# Altium PCB PCB_main_SAFMR.PcbDoc (part 1 of 3)
Units mm, origin at the board's own origin, x right, y up, seen from the top; angles counter-clockwise.
Board outline 128.65 x 96.9 mm, 4 copper layers (Top Layer 1, Top Layer, Bottom Layer, Bottom Layer 1), stack 0.603 mm thick; 100 components, 147 nets, 534 pads, 161 vias.
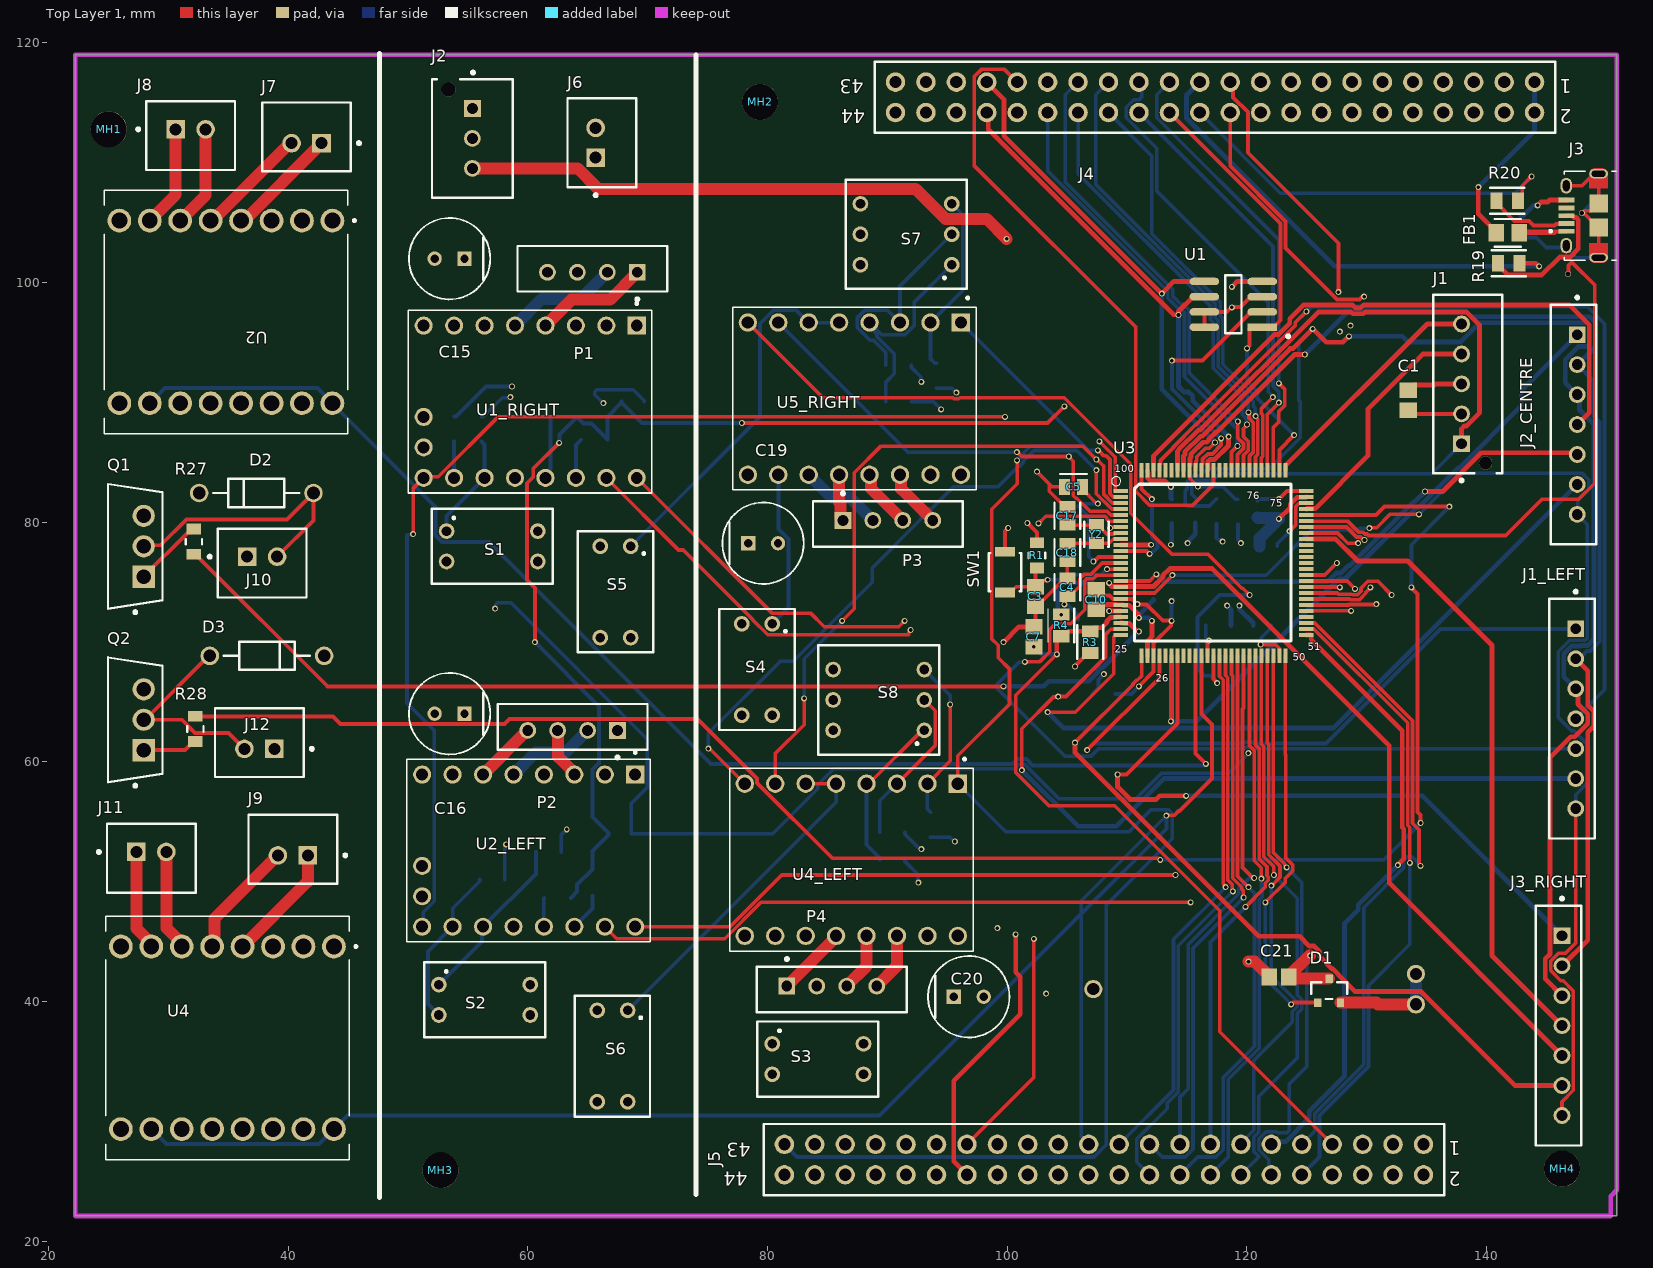
[diagram p0: Top Layer 1 view]
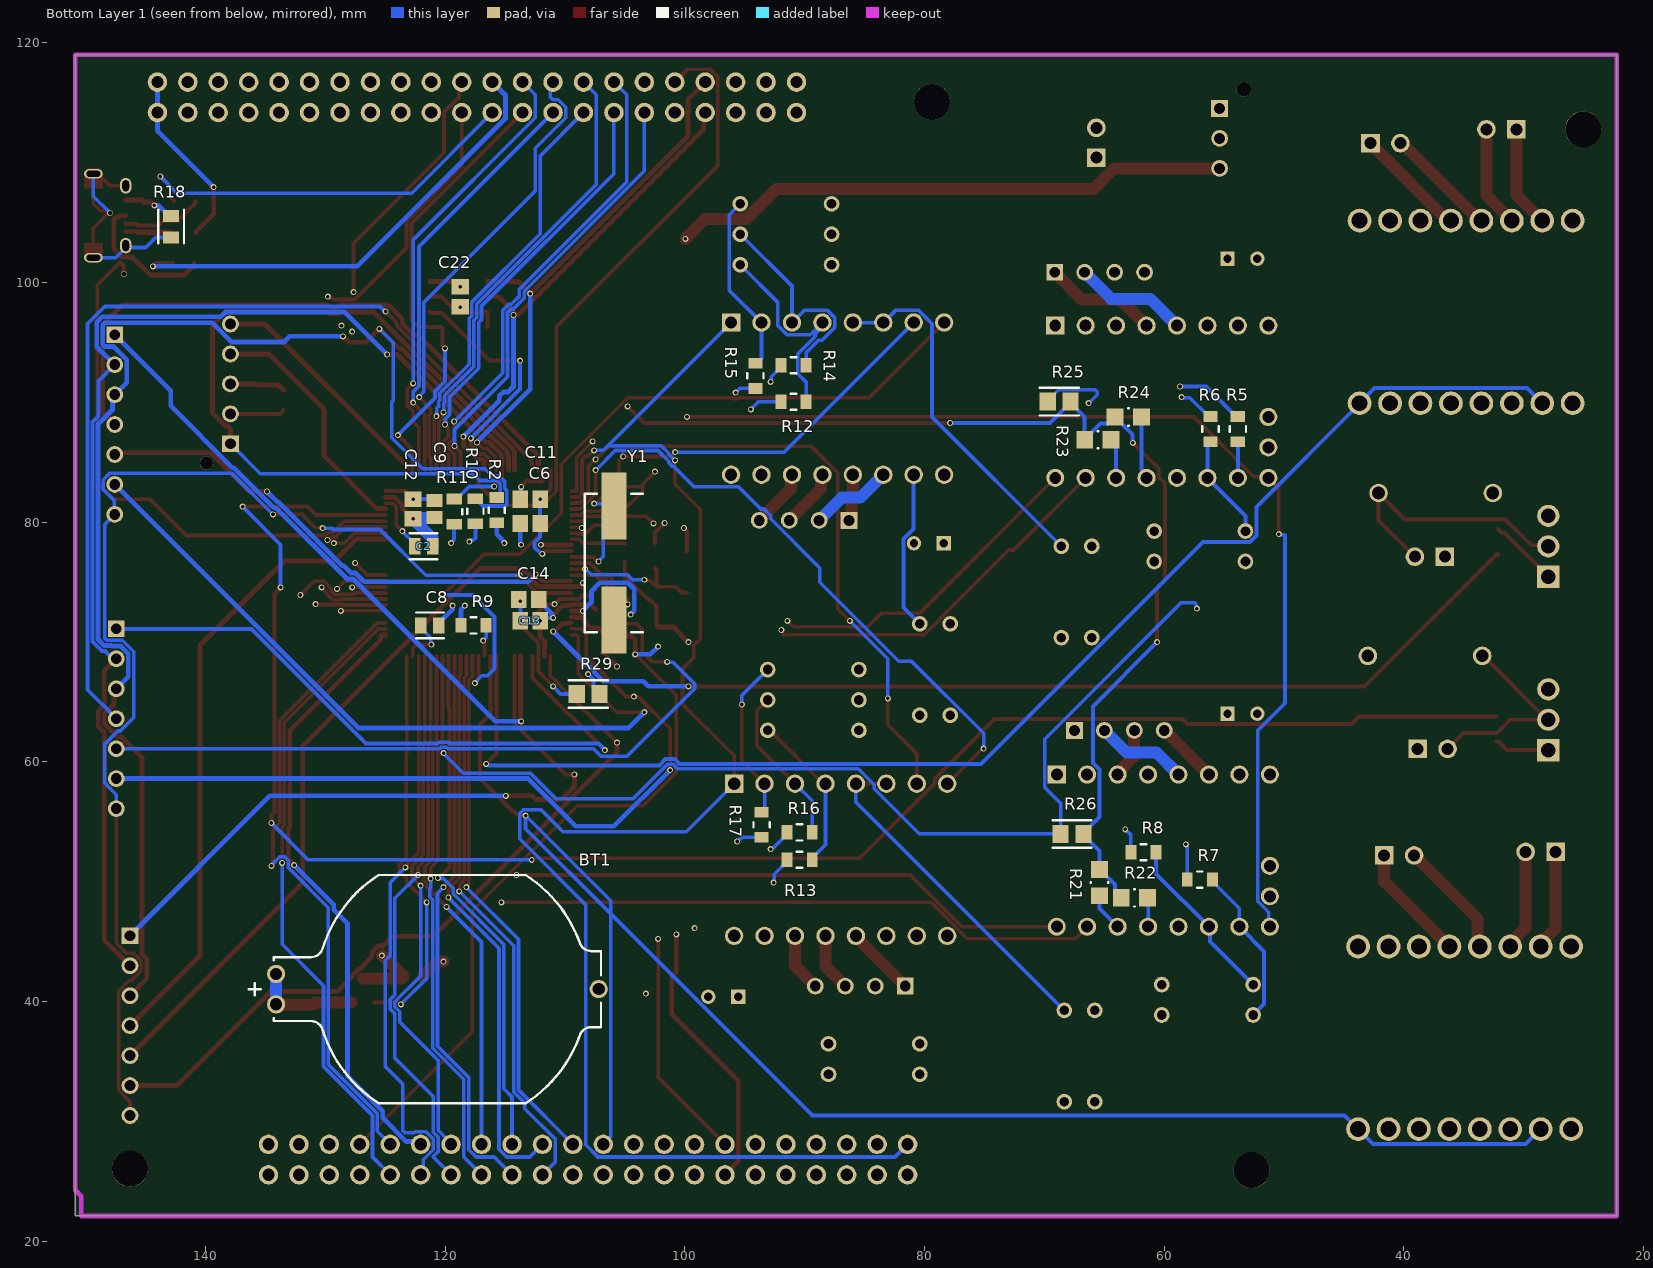
[diagram p1: Bottom Layer 1 view, seen from below]
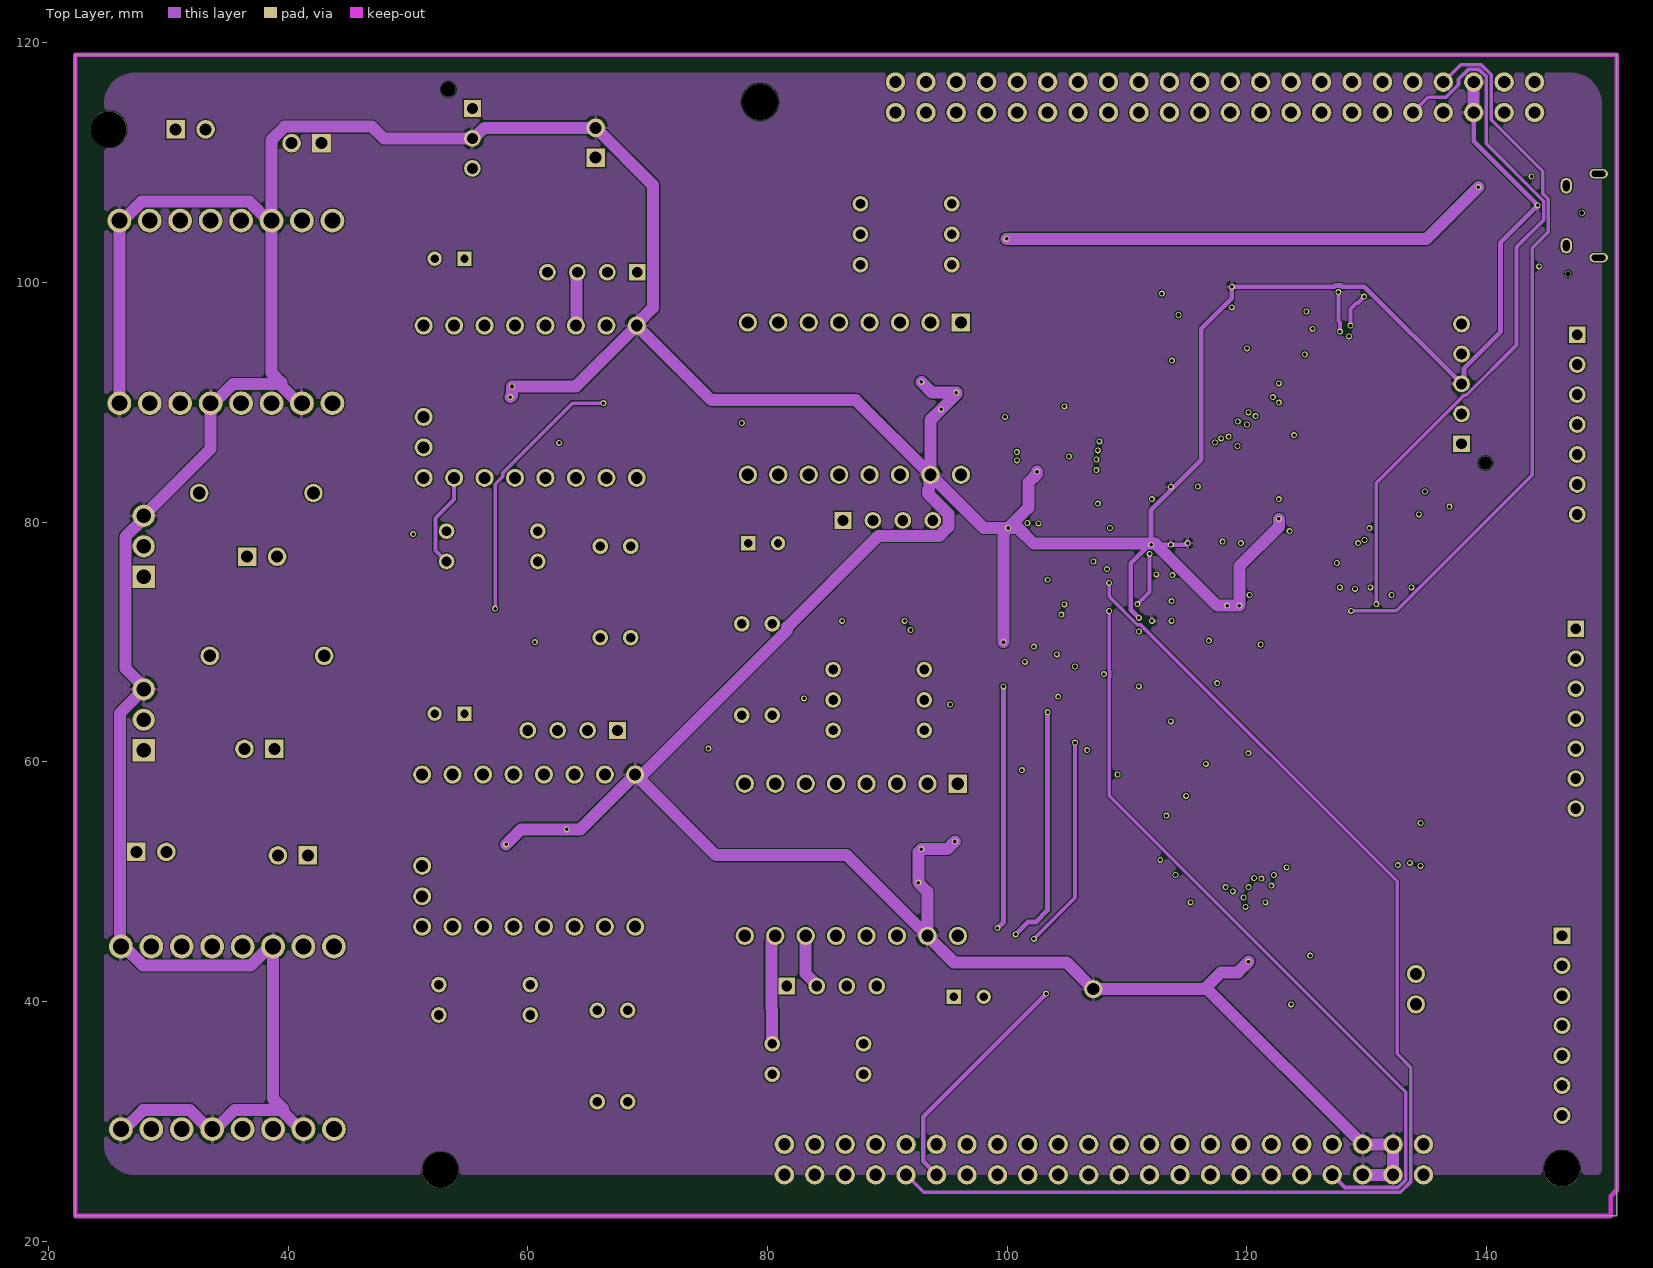
[diagram p2: Top Layer]
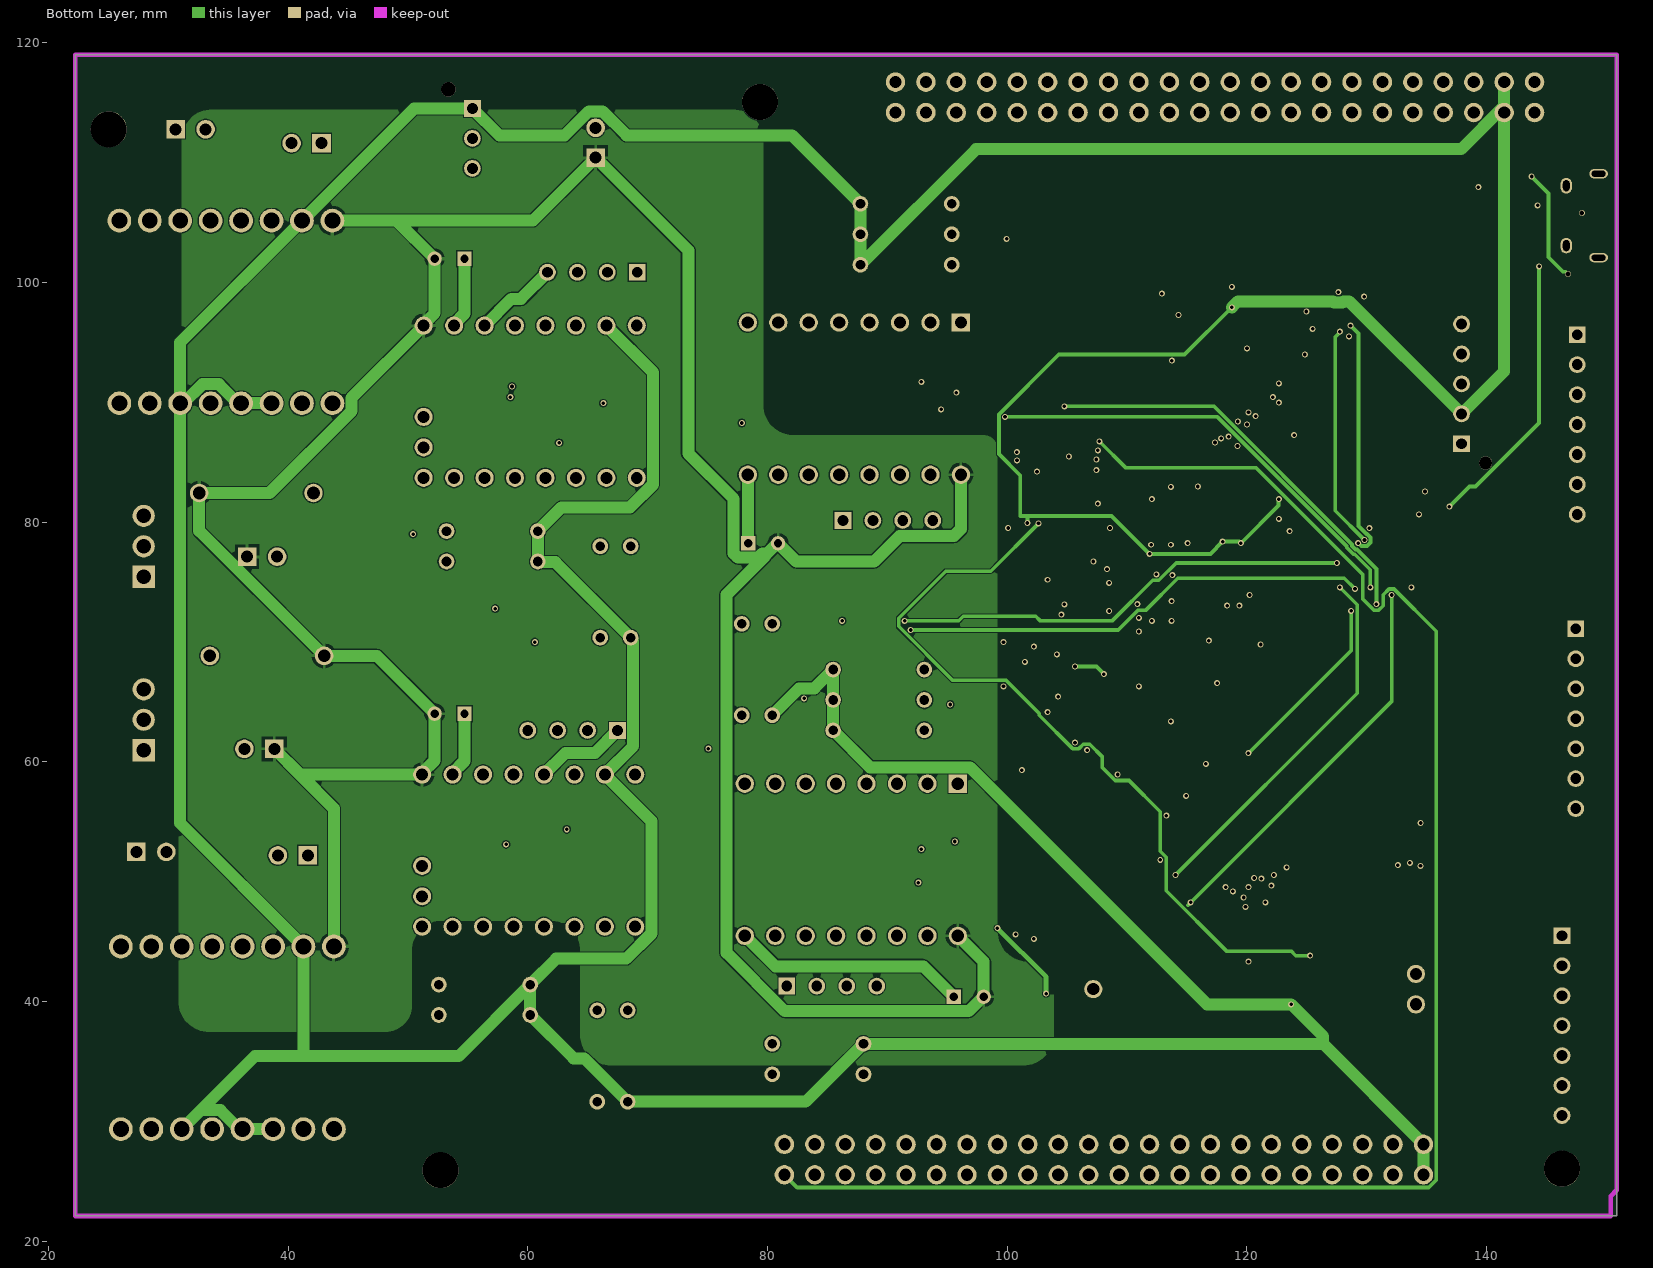
[diagram p3: Bottom Layer]
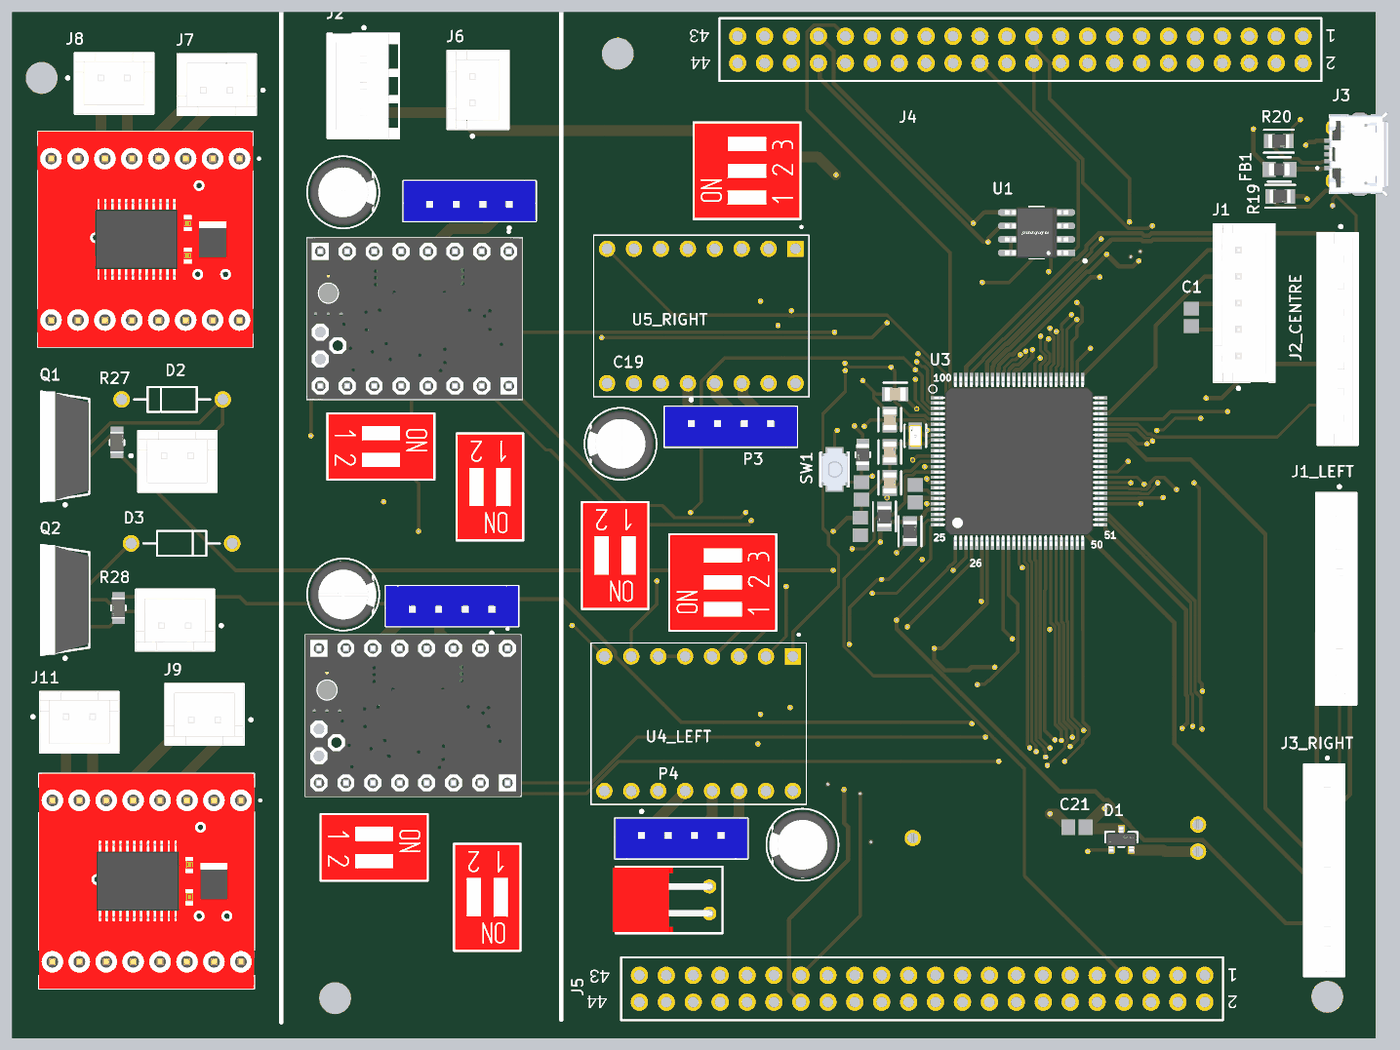
[diagram p5: 3D render of the assembled board from above, using the file's embedded part models]
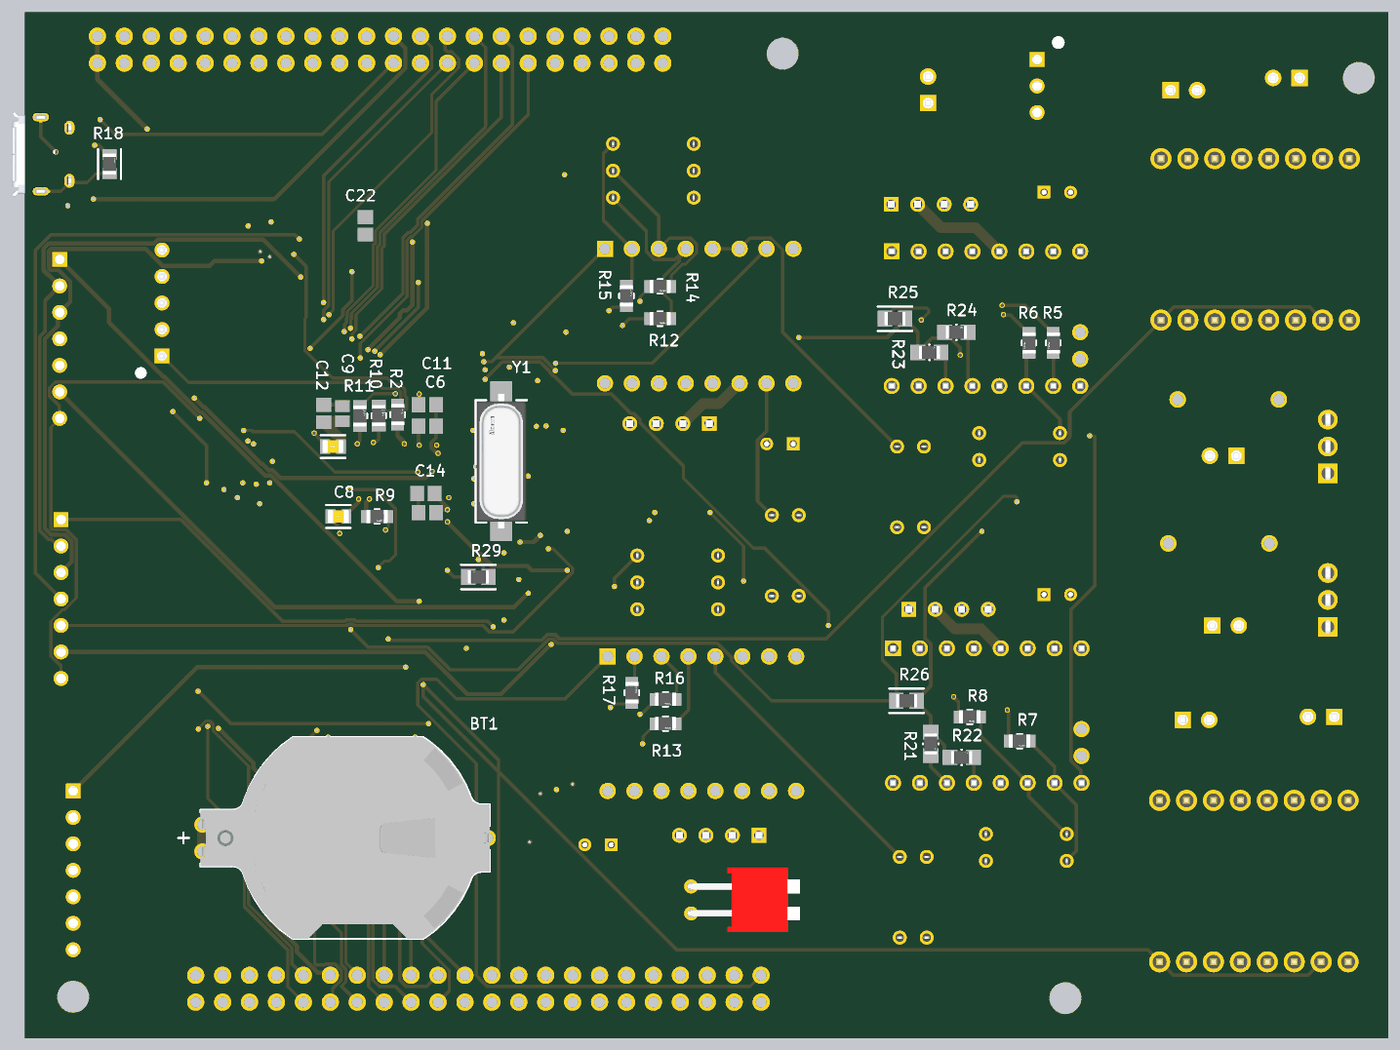
[diagram p6: 3D render of the assembled board from below, using the file's embedded part models]

## Layer stack, top to bottom
Top Solder: solder mask 0.0102, Solder Resist, Dk 3.5
Top Layer 1: signal copper 0.035
Dielectric 2: prepreg 0.0711, PP-006, Dk 4.1
Top Layer: signal copper 0.0356
Dielectric 1: dielectric 0.32, FR-4, Dk 4.8
Bottom Layer: signal copper 0.0356
Dielectric 3: prepreg 0.0711, PP-006, Dk 4.1
Bottom Layer 1: signal copper 0.035
Bottom Solder: solder mask 0.0102, Solder Resist, Dk 3.5

## Board outline
22.225,22.098 150.876,22.098 150.876,118.999 22.225,118.999

## Design rules (kind name [scope] priority, off if disabled: settings)
Clearance [All] p1: gap=0.1 ignorepadtopadclearanceinfootprint=FALSE
HoleSize [All] p1: absolutevalues=TRUE maxlimit=5 minlimit=0.025 maxpercent=80.000 minpercent=20.000
MinimumAnnularRing [All] p1: minimumring=0
MinimumSolderMaskSliver [All] p1: minsoldermaskwidth=0.1
PolygonConnect [All] p1: connectstyle=Relief reliefconductorwidth=0.254 reliefentries=4 polygonreliefangle="90 Angle" airgapwidth=0.254
RoutingVias [All] p1: holewidth=0.4 width=0.4 viastyle="Through Hole" minholewidth=0.3 minwidth=0.5 maxholewidth=0.711 maxwidth=1.27
SolderMaskExpansion [All] p1: expansion=0 istentingtop=FALSE
SupplyNets "Schematic Supply Nets_4" [InNet('3V3')] p1: voltage=0.000
SupplyNets "Schematic Supply Nets_2" [InNet('GND')] p2: voltage=0.000
SupplyNets "Schematic Supply Nets_1" [InNet('+5')] p3: voltage=0.000
SupplyNets "Schematic Supply Nets" [InNet('+12')] p4: voltage=0.000
Width [All] p1: maxlimit=1816.048 minlimit=0.3 preferedwidth=0.3
28 further rules are at their usual default settings.

## Components (designator, comment, footprint, x,y, rotation, side; value= is the part's Value field where it differs from the comment)
BT1 "120591-1" TECO-120591-1-2_V 120.65,41.021 r180 bottom
C1 "VJ0805Y104MXAAT" CAPC2013X145X48NL20T23 133.477,90.17 r270 top
C2 "C0805C225K4RACAUTO" FP-C0805C225K4RACAUTO-MFG 121.793,77.978 r0 bottom
C3 "VJ0805Y104MXAAT" CAPC2013X145X48NL20T23 102.362,73.787 r90 top
C4 "C0805C200J5GACAUTO" FP-C0805C-DN-MFG 105.029,74.549 r270 top value="20 pF"
C5 "C0805C200J5GACAUTO" FP-C0805C-DN-MFG 105.537,82.931 r0 top value="20 pF"
C6 "VJ0805Y104MXAAT" CAPC2013X145X48NL20T23 112.903,81.915 r180 bottom
C7 "VJ0805Y104MXAAT" CAPC2013X145X48NL20T23 102.235,70.421 r270 top
C8 "C0805C225K4RACAUTO" FP-C0805C225K4RACAUTO-MFG 121.285,71.374 r0 bottom
C9 "C0805C106K8RACTU" CAPC2013X145X50LL20T25 120.904,81.091 r90 bottom
C10 "VJ0805Y104MXAAT" CAPC2013X145X48NL20T23 107.442,73.533 r90 top
C11 "VJ0805Y104MXAAT" CAPC2013X145X48NL20T23 112.903,79.883 r180 bottom
C12 "VJ0805Y104MXAAT" CAPC2013X145X48NL20T23 122.682,81.089 r90 bottom
C13 "VJ0805Y104MXAAT" CAPC2013X145X48NL20T23 112.903,71.755 r0 bottom
C14 "VJ0805Y104MXAAT" CAPC2013X145X48NL20T23 113.03,73.533 r0 bottom
C15 "EEUFM1E101B" FP-RAD-TH-D_6_3_0_5-L_11-MFG 53.467,101.981 r180 top
C16 "EEUFM1E101B" FP-RAD-TH-D_6_3_0_5-L_11-MFG 53.467,64.008 r180 top
C17 "C0805C120JAGACTU" FP-C0805C-DN-MFG 105.029,80.518 r270 top value="12 pF"
C18 "C0805C120JAGACTU" FP-C0805C-DN-MFG 105.029,77.458 r270 top value="12 pF"
C19 "EEUFM1E101B" FP-RAD-TH-D_6_3_0_5-L_11-MFG 79.629,78.232 r0 top
C20 "EEUFM1E101B" FP-RAD-TH-D_6_3_0_5-L_11-MFG 96.794,40.386 r0 top
C21 "VJ0805Y104MXAAT" CAPC2013X145X48NL20T23 122.682,42.037 r0 top
C22 "VJ0805Y104MXAAT" CAPC2013X145X48NL20T23 118.745,98.806 r90 bottom
D1 "BAT54C,215" FP-SOT23-MFG 126.873,40.894 r90 top value=10pF
D2 "1N5819G" ONSC-AXIAL_LEAD-2-59-10_P 37.338,82.423 r0 top
D3 "1N5819G" ONSC-AXIAL_LEAD-2-59-10_P 38.227,68.834 r180 top
FB1 "HZ0805E601R-10" FP-HZ0805-MFG 141.776,104.14 r0 top
J1 "B5B-XH-AM(LF)(SN)" FP-B5B-XH-AM_LF_SN-MFG 138.447,91.527 r270 top
J1_LEFT "B7B-EH-A(LF)(SN)" FP-B7B-EH-A_LF_SN-MFG 147.147,63.587 r270 top
J2 "BH3B-XH-2(LF)(SN)" FP-BH3B-XH-2_LF_SN-MFG 55.372,112.014 r90 top
J2_CENTRE "B7B-EH-A(LF)(SN)" FP-B7B-EH-A_LF_SN-MFG 147.274,88.138 r270 top
J3 "10118194-0001LF" AMPHENOL_10118194-0001LF 149.36,105.567 r90 top
J3_RIGHT "B7B-EH-A(LF)(SN)" FP-B7B-EH-A_LF_SN-MFG 146.004,37.973 r270 top
J4 "SAMTEC-HTSW-122-07-X-DJ" SAMTEC-HTSW-122-07-X-D 117.348,115.443 r180 top
J5 "SAMTEC-HTSW-122-07-X-DJ" SAMTEC-HTSW-122-07-X-D 108.077,26.797 r180 top
J6 "B2B-XH-A(LF)(SN)" FP-B2B-XH-A_LF_SN-MFG 66.184,111.653 r90 top
J7 "B2B-XH-A(LF)(SN)" FP-B2B-XH-A_LF_SN-MFG 41.529,112.141 r180 top
J8 "B2B-XH-A(LF)(SN)" FP-B2B-XH-A_LF_SN-MFG 31.857,112.251 r0 top
J9 "B2B-XH-A(LF)(SN)" FP-B2B-XH-A_LF_SN-MFG 40.386,52.705 r180 top
J10 "B2B-XH-A(LF)(SN)" FP-B2B-XH-A_LF_SN-MFG 37.825,76.581 r0 top
J11 "B2B-XH-A(LF)(SN)" FP-B2B-XH-A_LF_SN-MFG 28.575,51.943 r0 top
J12 "B2B-XH-A(LF)(SN)" FP-B2B-XH-A_LF_SN-MFG 37.592,61.595 r180 top
MH1 "MH" MH 25.019,112.776 r0 top
MH2 "MH" MH 79.375,115.062 r90 top
MH3 "MH" MH 52.705,25.908 r0 top
MH4 "MH" MH 146.304,26.035 r0 top
P1 "B4B-EH-A(LF)(SN)" JST-B4B-EH-A_V 65.385,100.838 r180 top
P2 "B4B-EH-A(LF)(SN)" JST-B4B-EH-A_V 63.734,62.611 r180 top
P3 "B4B-EH-A(LF)(SN)" JST-B4B-EH-A_V 90.043,80.137 r0 top
P4 "B4B-EH-A(LF)(SN)" JST-B4B-EH-A_V 85.364,41.275 r0 top
Q1 "IRLZ44NPbF" FP-PG-TO220-3-MFG 27.235,77.978 r180 top
Q2 "IRLZ44NPbF" FP-PG-TO220-3-MFG 27.235,63.5 r180 top
R1 "AT0805DRE0710KL" FP-AT0805-MFG 102.489,77.216 r270 top
R2 "AT0805DRE0710KL" FP-AT0805-MFG 115.697,80.992 r90 bottom
R3 "AF0805JR-070RL" FP-AF0805-IPC_B 106.934,69.977 r90 top
R4 "AF0805JR-070RL" FP-AF0805-IPC_B 104.521,71.374 r270 top
R5 "AT0805DRE0710KL" FP-AT0805-MFG 53.848,87.757 r270 bottom
R6 "AT0805DRE0710KL" FP-AT0805-MFG 56.134,87.757 r270 bottom
R7 "AT0805DRE0710KL" FP-AT0805-MFG 57.023,50.165 r180 bottom
R8 "AT0805DRE0710KL" FP-AT0805-MFG 61.722,52.451 r180 bottom
R9 "AT0805DRE0710KL" FP-AT0805-MFG 117.636,71.374 r180 bottom
R10 "RMCF0805JG4K70" FP-RMCF0805-MFG 117.475,80.899 r90 bottom
R11 "RMCF0805JG4K70" FP-RMCF0805-MFG 119.253,80.865 r90 bottom
R12 "AT0805DRE0710KL" FP-AT0805-MFG 90.932,90.043 r180 bottom
R13 "AT0805DRE0710KL" FP-AT0805-MFG 90.424,51.816 r180 bottom
R14 "AT0805DRE0710KL" FP-AT0805-MFG 90.932,93.091 r180 bottom
R15 "AT0805DRE0710KL" FP-AT0805-MFG 94.107,92.202 r90 bottom
R16 "AT0805DRE0710KL" FP-AT0805-MFG 90.424,54.102 r180 bottom
R17 "AT0805DRE0710KL" FP-AT0805-MFG 93.599,54.737 r90 bottom
R18 "AF0805JR-070RL" FP-AF0805-IPC_B 142.875,104.648 r90 bottom
R19 "AF0805JR-070RL" FP-AF0805-IPC_B 141.859,101.6 r0 top
R20 "AF0805JR-070RL" FP-AF0805-IPC_B 141.732,106.807 r0 top
R21 "HCJ0805ZT0R00" FP-HCJ0805-MFG 65.405,49.911 r270 bottom
R22 "HCJ0805ZT0R00" FP-HCJ0805-MFG 62.484,48.641 r180 bottom
R23 "HCJ0805ZT0R00" FP-HCJ0805-MFG 65.532,86.868 r180 bottom
R24 "HCJ0805ZT0R00" FP-HCJ0805-MFG 62.992,88.773 r180 bottom
R25 "TFCR0805-10W-E-1001BT" FP-TFCR0805-IPC_A 68.772,90.043 r0 bottom
R26 "TFCR0805-10W-E-1001BT" FP-TFCR0805-IPC_A 67.691,53.975 r0 bottom
R27 "AC0805FR-07220RL" FP-AC0805-MFG 32.131,78.359 r90 top value=220Ω
R28 "AC0805FR-07220RL" FP-AC0805-MFG 32.258,62.738 r270 top value=220Ω
R29 "TFCR0805-10W-E-1001BT" FP-TFCR0805-IPC_A 108.077,65.659 r180 bottom
S1 "418117270902" 418117270902 57.023,77.978 r270 top
S2 "418117270902" 418117270902 56.388,40.132 r270 top
S3 "418117270902" 418117270902 84.201,35.179 r270 top
S4 "418117270902" 418117270902 79.121,67.691 r180 top
S5 "418117270902" 418117270902 67.31,74.168 r180 top
S6 "418117270902" 418117270902 67.056,35.433 r180 top
S7 "418117270903" 418117270903 91.567,104.013 r90 top
S8 "418117270903" 418117270903 89.281,65.151 r90 top
SW1 "B3U-1000P" FP-B3U-1000P-MFG 99.822,75.819 r90 top
U1 "W25Q16JVSNIQ TR" FP-W25Q16JVSNIQ_TR-IPC_A 118.875,98.171 r180 top
U1_RIGHT "TMC2209_SILENTSTEPSTICK" MODULE_TMC2209_SILENTSTEPSTICK 60.198,90.043 r270 top
U2 "ROB-14450" MODULE_ROB-14450 34.798,97.536 r270 top
U2_LEFT "TMC2209_SILENTSTEPSTICK" MODULE_TMC2209_SILENTSTEPSTICK 60.071,52.578 r270 top
U3 "MCU-STM32F407VET6(LQFP100)" LQFP100-0.5-13.8X13.8MM 117.221,76.581 r0 top locked
U4 "ROB-14450" MODULE_ROB-14450 34.925,36.957 r270 top
U4_LEFT "A4988_STEPPER_MOTOR_DRIVER_CARRIER" MODULE_A4988_STEPPER_MOTOR_DRIVER_CARRIER 86.995,51.816 r270 top
U5_RIGHT "A4988_STEPPER_MOTOR_DRIVER_CARRIER" MODULE_A4988_STEPPER_MOTOR_DRIVER_CARRIER 87.249,90.297 r270 top
Y1 "ABLS-8.000MHZ-B2-T" FP-ABLS-MFG 105.918,76.581 r90 bottom
Y2 "NX2012SA-32.768K-STD-MUB-1" FP-NX2012SA-MFG 107.442,78.994 r270 top

## Footprints (in the part's own frame and the unit in brackets; to place one, negate y for a bottom-side part, rotate by r counter-clockwise, add the part's x,y. Pads: shape width x height; smd on the part's side, far side on the other; paste and mask are expansions set on the pad)
418117270902 [mm]
  round 1.308 hole 0.8: 1(-1.27,-3.81) 2(1.27,-3.81) A1(-1.27,3.81) A2(1.27,3.81)
  silkscreen extent -3.14,-5.05 3.14,5.05, body extent -3.04,-4.95 3.04,4.95, height 6.45
418117270903 [mm]
  round 1.308 hole 0.8: 1(-2.54,-3.81) 2(0,-3.81) 3(2.54,-3.81) A1(-2.54,3.81) A2(0,3.81) A3(2.54,3.81)
  silkscreen extent -4.56,-5.05 4.56,5.05, body extent -4.46,-4.95 4.46,4.95, height 6.45
AMPHENOL_10118194-0001LF [mm]
  rect 0.4x1.35 smd: 1(-1.3,2.675) 2(-0.65,2.675) 3(0,2.675) 4(0.65,2.675) 5(1.3,2.675)
  oval 0.775x1.55 hole 0.5 slot 1.15 at 90 deg mask+0: SH1(-3.5,0) SH4(3.5,0)
  rect 1.5x1.55 smd: SH2(1,0) SH3(-1,0)
  oval 1.3x0.95 hole 0.55 slot 0.9 at 0 deg: SH5(-2.5,2.7) SH6(2.5,2.7)
  Top Layer 1 region: -2.3,-0.775 -3.445,-0.775 -3.471,-0.774 -3.497,-0.772 -3.523,-0.769 -3.549,-0.764 -3.574,-0.758 -3.6,-0.751 -3.624,-0.742 -3.648,-0.732 -3.672,-0.721 -3.695,-0.708 -3.717,-0.694 -3.739,-0.68 -3.76,-0.664 -3.78,-0.647 -3.799,-0.629 -3.817,-0.61 -3.834,-0.59 -3.85,-0.569 -3.864,-0.547 -3.878,-0.525 -3.891,-0.502 -3.902,-0.478 -3.912,-0.454 -3.921,-0.43 -3.928,-0.404 -3.934,-0.379 -3.939,-0.353 -3.942,-0.327 -3.944,-0.301 -3.945,-0.275 -3.945,0.275 -3.944,0.301 -3.942,0.327 -3.939,0.353 -3.934,0.379 -3.928,0.404 -3.921,0.43 -3.912,0.454 -3.902,0.478 -3.891,0.502 -3.878,0.525 -3.864,0.547 -3.85,0.569 -3.834,0.59 -3.817,0.61 -3.799,0.629 -3.78,0.647 -3.76,0.664 -3.739,0.68 -3.717,0.694 -3.695,0.708 -3.672,0.721 -3.648,0.732 -3.624,0.742 -3.6,0.751 -3.574,0.758 -3.549,0.764 -3.523,0.769 -3.497,0.772 -3.471,0.774 -3.445,0.775 -2.3,0.775
  Top Layer 1 region: 3.471,0.774 3.497,0.772 3.523,0.769 3.549,0.764 3.574,0.758 3.6,0.751 3.624,0.742 3.648,0.732 3.672,0.721 3.695,0.708 3.717,0.694 3.739,0.68 3.76,0.664 3.78,0.647 3.799,0.629 3.817,0.61 3.834,0.59 3.85,0.569 3.864,0.547 3.878,0.525 3.891,0.502 3.902,0.478 3.912,0.454 3.921,0.43 3.928,0.404 3.934,0.379 3.939,0.353 3.942,0.327 3.944,0.301 3.945,0.275 3.945,-0.275 3.944,-0.301 3.942,-0.327 3.939,-0.353 3.934,-0.379 3.928,-0.404 3.921,-0.43 3.912,-0.454 3.902,-0.478 3.891,-0.502 3.878,-0.525 3.864,-0.547 3.85,-0.569 3.834,-0.59 3.817,-0.61 3.799,-0.629 3.78,-0.647 3.76,-0.664 3.739,-0.68 3.717,-0.694 3.695,-0.708 3.672,-0.721 3.648,-0.732 3.624,-0.742 3.6,-0.751 3.574,-0.758 3.549,-0.764 3.523,-0.769 3.497,-0.772 3.471,-0.774 3.445,-0.775 2.3,-0.775 2.3,0.775 3.445,0.775
  silkscreen extent -3.7,-1.45 3.7,4.1, body extent -4.02,-2.68 4.02,2.85, height 2.67
CAPC2013X145X48NL20T23 [mm] "Chip Capacitor, 2-Leads, Body 2.00x1.25mm, IPC Medium Density"
  rect 1.3x1.45 smd: 1(-0.825,0) 2(0.825,0)
  body extent -1.1,-0.72 1.1,0.72, height 1.45
CAPC2013X145X50LL20T25 [mm] "Chip Capacitor, 2-Leads, Body 2.00x1.25mm, IPC High Density"
  rect 1.1x1.35 smd: 1(-0.7,0) 2(0.7,0)
  body extent -1.1,-0.72 1.1,0.72, height 1.45
FP-ABLS-MFG [mm]
  rect 5.6x2.1 smd paste+0 mask+0: 1(-4.75,0) 2(4.75,0)
  silkscreen extent -5.77,-2.42 5.77,2.42, body extent -6.35,-2.35 6.35,2.35, height 4.3
FP-AC0805-MFG [mm]
  rect 0.9x1.2 smd paste+0 mask+0: 1(-1.05,0) 2(1.05,0)
  silkscreen extent -0.23,-0.67 0.23,0.67, body extent -1.6,-0.77 1.6,0.77, height 0.25
FP-AF0805-IPC_B [mm]
  rect 1.008x1.362 smd paste+0 mask+0: 1(-0.902,0) 2(0.902,0)
  silkscreen extent -1.41,-1.08 1.41,1.08, body extent -1.66,-0.93 1.66,0.93, height 0.25
FP-AT0805-MFG [mm]
  rect 0.9x1.2 smd paste+0 mask+0: 1(-1.05,0) 2(1.05,0)
  silkscreen extent -0.23,-0.67 0.23,0.67, body extent -1.6,-0.77 1.6,0.77, height 0.25
FP-B2B-XH-A_LF_SN-MFG [mm]
  rect 1.55x1.55 hole 1 paste-2539.97 mask+0: 1(-1.25,0.525)
  round 1.55 hole 1 paste-2539.97 mask+0: 2(1.25,0.525)
  silkscreen extent -4.5,-2.88 3.7,2.88, body extent -3.8,-2.98 3.8,2.98, height 0.25
FP-B3U-1000P-MFG [mm]
  rect 0.8x1.7 smd paste+0 mask+0: 1(-1.7,0) 2(1.7,0)
  silkscreen extent -1.6,-1.35 1.6,1.35, body extent -2.2,-1.45 2.2,1.45, height 0.25
FP-B5B-XH-AM_LF_SN-MFG [mm]
  rect 1.4x1.4 hole 0.9 paste-2539.97 mask+0: 1(5,-0.525)
  round 1.4 hole 0.9 paste-2539.97 mask+0: 2(2.5,-0.525) 3(0,-0.525) 4(-2.5,-0.525) 5(-5,-0.525)
  round 1.1 hole 1.1 unplated paste-2539.97 mask+0: ""(6.6,1.475)
  silkscreen extent -7.45,-2.88 8.17,2.88, body extent -7.55,-2.98 7.55,2.98, height 0.25
FP-B7B-EH-A_LF_SN-MFG [mm]
  rect 1.4x1.4 hole 0.9 paste-2539.97 mask+0: 1(-7.5,0.3)
  round 1.4 hole 0.9 paste-2539.97 mask+0: 2(-5,0.3) 3(-2.5,0.3) 4(0,0.3) 5(2.5,0.3) 6(5,0.3) 7(7.5,0.3)
  silkscreen extent -10.72,-1.9 10,1.9, body extent -10.1,-2 10.1,2, height 0.25
FP-BH3B-XH-2_LF_SN-MFG [mm]
  rect 1.4x1.4 hole 0.9 paste-2539.97 mask+0: 1(2.5,0)
  round 1.4 hole 0.9 paste-2539.97 mask+0: 2(0,0) 3(-2.5,0)
  round 1.2 hole 1.2 unplated paste-2539.97 mask+0: ""(4.1,2)
  silkscreen extent -4.95,-3.37 5.62,3.37, body extent -5.05,-3.47 5.05,3.47, height 0.25
FP-C0805C225K4RACAUTO-MFG [mm]
  rect 0.95x1.35 smd paste+0 mask+0: 1(-0.75,0) 2(0.75,0)
  silkscreen extent -1.15,-1.07 1.15,1.07, body extent -1,-0.63 1,0.63, height 1.4
FP-C0805C-DN-MFG [mm]
  rect 0.95x1.35 smd paste+0 mask+0: 1(-0.75,0) 2(0.75,0)
  silkscreen extent -1.1,-1.07 1.1,1.07, body extent -1.4,-0.85 1.4,0.85, height 0.25
FP-HCJ0805-MFG [mm]
  rect 1.4x1.44 smd paste+0 mask+0: 1(-1.1,0) 2(1.1,0)
  silkscreen extent -0.03,-0.72 0.03,0.72, body extent -1,-0.6 1,0.6, height 0.85
FP-HZ0805-MFG [mm]
  rect 1.285x1.47 smd paste+0 mask+0: 1(-0.972,0) 2(0.972,0)
  silkscreen extent -1.1,-1.15 1.1,1.15, body extent -1.72,-0.83 1.72,0.83, height 0.25
FP-NX2012SA-MFG [mm]
  rect 1x1.25 smd paste+0 mask+0: 1(-0.75,0) 2(0.75,0)
  silkscreen extent -1.05,-1.02 1.05,1.02, body extent -1.35,-0.72 1.35,0.72, height 0.25
FP-PG-TO220-3-MFG [mm]
  rect 1.85x1.85 hole 1.2 paste-2539.97 mask+0: 1(-0.705,2.54)
  round 1.85 hole 1.2 paste-2539.97 mask+0: 2(-0.705,0) 3(-0.705,-2.54)
  silkscreen extent -2.27,-5.2 2.27,5.62, body extent -2.37,-5.55 2.37,5.55, height 0.25
FP-RAD-TH-D_6_3_0_5-L_11-MFG [mm]
  rect 1.2x1.2 hole 0.7 paste-2539.97 mask+0: 1(-1.25,0)
  round 1.2 hole 0.7 paste-2539.97 mask+0: 2(1.25,0)
  silkscreen extent -3.4,-3.4 3.4,3.4, body extent -3.5,-3.5 3.5,3.5, height 0.25
FP-RMCF0805-MFG [mm]
  rect 0.9x1.3 smd paste+0 mask+0: 1(-1.05,0) 2(1.05,0)
  silkscreen extent -0.23,-0.67 0.23,0.67, body extent -1,-0.63 1,0.63, height 0.65
FP-SOT23-MFG [mm]
  rect 0.7x0.6 smd paste-1000 mask+0: 1(-1,0.95) 2(-1,-0.95) 3(1,0)
  silkscreen extent -0.7,-1.5 0.7,1.5, body extent -1.5,-1.65 1.5,1.65, height 0.25
FP-TFCR0805-IPC_A [mm]
  rect 1.356x1.508 smd paste+0 mask+0: 1(-0.951,0) 2(0.951,0)
  silkscreen extent -1.63,-1.15 1.63,1.15, body extent -1,-0.63 1,0.63, height 0.65
FP-W25Q16JVSNIQ_TR-IPC_A [mm]
  rect 2.474x0.623 smd paste+0 mask+0: 1(-2.416,1.905)
  rrect100% 2.474x0.623 smd paste+0 mask+0: 2(-2.416,0.635) 3(-2.416,-0.635) 4(-2.416,-1.905) 5(2.416,-1.905) 6(2.416,-0.635) 7(2.416,0.635) 8(2.416,1.905)
  silkscreen extent -4.69,-2.42 0.68,2.79, body extent -3,-2.42 3,2.42, height 1.75
JST-B4B-EH-A_V [mm] "Header, 4-Leads, Body 12.5x3.8mm, Pitch 2.5mm"
  rect 1.4x1.4 hole 0.9: 1(-3.75,0)
  round 1.4 hole 0.9: 2(-1.25,0) 3(1.25,0) 4(3.75,0)
  silkscreen extent -6.25,-2.2 6.25,2.37, body extent -6.25,-2.2 6.25,1.6, height 6
LQFP100-0.5-13.8X13.8MM [mm]
  rect 1.2x0.32 smd: 1(-7.75,6) 2(-7.75,5.5) 3(-7.75,5) 4(-7.75,4.5) 5(-7.75,4) 6(-7.75,3.5) 7(-7.75,3) 8(-7.75,2.5) 9(-7.75,2) 10(-7.75,1.5) 11(-7.75,1) 12(-7.75,0.5) 13(-7.75,0) 14(-7.75,-0.5) 15(-7.75,-1) 16(-7.75,-1.5) 17(-7.75,-2) 18(-7.75,-2.5) 19(-7.75,-3) 20(-7.75,-3.5) 21(-7.75,-4) 22(-7.75,-4.5) 23(-7.75,-5) 24(-7.75,-5.5) 25(-7.75,-6) 51(7.75,-6) 52(7.75,-5.5) 53(7.75,-5) 54(7.75,-4.5) 55(7.75,-4) 56(7.75,-3.5) 57(7.75,-3) 58(7.75,-2.5) 59(7.75,-2) 60(7.75,-1.5) 61(7.75,-1) 62(7.75,-0.5) 63(7.75,0) 64(7.75,0.5) 65(7.75,1) 66(7.75,1.5) 67(7.75,2) 68(7.75,2.5) 69(7.75,3) 70(7.75,3.5) 71(7.75,4) 72(7.75,4.5) 73(7.75,5) 74(7.75,5.5) 75(7.75,6)
  rect 0.32x1.2 smd: 26(-6,-7.75) 27(-5.5,-7.75) 28(-5,-7.75) 29(-4.5,-7.75) 30(-4,-7.75) 31(-3.5,-7.75) 32(-3,-7.75) 33(-2.5,-7.75) 34(-2,-7.75) 35(-1.5,-7.75) 36(-1,-7.75) 37(-0.5,-7.75) 38(0,-7.75) 39(0.5,-7.75) 40(1,-7.75) 41(1.5,-7.75) 42(2,-7.75) 43(2.5,-7.75) 44(3,-7.75) 45(3.5,-7.75) 46(4,-7.75) 47(4.5,-7.75) 48(5,-7.75) 49(5.5,-7.75) 50(6,-7.75) 76(6,7.75) 77(5.5,7.75) 78(5,7.75) 79(4.5,7.75) 80(4,7.75) 81(3.5,7.75) 82(3,7.75) 83(2.5,7.75) 84(2,7.75) 85(1.5,7.75) 86(1,7.75) 87(0.5,7.75) 88(0,7.75) 89(-0.5,7.75) 90(-1,7.75) 91(-1.5,7.75) 92(-2,7.75) 93(-2.5,7.75) 94(-3,7.75) 95(-3.5,7.75) 96(-4,7.75) 97(-4.5,7.75) 98(-5,7.75) 99(-5.5,7.75) 100(-6,7.75)
  silkscreen extent -8.51,-6.51 6.47,7.21, body extent -8,-8 8,8, height 1.6
MH [mm]
  round 3 hole 3: 2(0,0)
MODULE_A4988_STEPPER_MOTOR_DRIVER_CARRIER [mm]
  rect 1.53x1.53 hole 1.02: 1(-6.35,8.89)
  round 1.53 hole 1.02: 2(-6.35,6.35) 3(-6.35,3.81) 4(-6.35,1.27) 5(-6.35,-1.27) 6(-6.35,-3.81) 7(-6.35,-6.35) 8(-6.35,-8.89) 9(6.35,-8.89) 10(6.35,-6.35) 11(6.35,-3.81) 12(6.35,-1.27) 13(6.35,1.27) 14(6.35,3.81) 15(6.35,6.35) 16(6.35,8.89)
  silkscreen extent -8.5,-10.16 7.62,10.16
MODULE_ROB-14450 [mm]
  round 1.98 hole 1.32: 1(-7.62,8.89) 2(-7.62,6.35) 3(-7.62,3.81) 4(-7.62,1.27) 5(-7.62,-1.27) 6(-7.62,-3.81) 7(-7.62,-6.35) 8(-7.62,-8.89) 9(7.62,-8.89) 10(7.62,-6.35) 11(7.62,-3.81) 12(7.62,-1.27) 13(7.62,1.27) 14(7.62,3.81) 15(7.62,6.35) 16(7.62,8.89)
  silkscreen extent -10.16,-10.16 10.16,10.83, body extent -10.16,-10.16 10.16,10.16, height 5.5
MODULE_TMC2209_SILENTSTEPSTICK [mm]
  rect 1.508x1.508 / inner round 1.508 / far side rect 1.508x1.508 hole 1: 1(-6.35,8.89)
  round 1.508 hole 1: 2(-6.35,6.35) 3(-6.35,3.81) 4(-6.35,1.27) 5(-6.35,-1.27) 6(-6.35,-3.81) 7(-6.35,-6.35) 8(-6.35,-8.89) 9(6.35,8.89) 10(6.35,6.35) 11(6.35,3.81) 12(6.35,1.27) 13(6.35,-1.27) 14(6.35,-3.81) 15(6.35,-6.35) 16(6.35,-8.89) 17(1.27,-8.89) 18(3.81,-8.89)
  silkscreen extent -8.3,-10.16 7.62,10.16, body extent -7.62,-10.16 7.62,10.16, height 5.5
ONSC-AXIAL_LEAD-2-59-10_P [mm] "AXIAL, 2-Leads, Diameter 2.35mm"
  round 1.55 hole 1.05: 1(-4.77,0) 2(4.77,0)
  silkscreen extent -3.59,-1.17 3.59,1.17
SAMTEC-HTSW-122-07-X-D [mm]
  round 1.62 hole 1.02: 1(-26.67,-1.27) 2(-26.67,1.27) 3(-24.13,-1.27) 4(-24.13,1.27) 5(-21.59,-1.27) 6(-21.59,1.27) 7(-19.05,-1.27) 8(-19.05,1.27) 9(-16.51,-1.27) 10(-16.51,1.27) 11(-13.97,-1.27) 12(-13.97,1.27) 13(-11.43,-1.27) 14(-11.43,1.27) 15(-8.89,-1.27) 16(-8.89,1.27) 17(-6.35,-1.27) 18(-6.35,1.27) 19(-3.81,-1.27) 20(-3.81,1.27) 21(-1.27,-1.27) 22(-1.27,1.27) 23(1.27,-1.27) 24(1.27,1.27) 25(3.81,-1.27) 26(3.81,1.27) 27(6.35,-1.27) 28(6.35,1.27) 29(8.89,-1.27) 30(8.89,1.27) 31(11.43,-1.27) 32(11.43,1.27) 33(13.97,-1.27) 34(13.97,1.27) 35(16.51,-1.27) 36(16.51,1.27) 37(19.05,-1.27) 38(19.05,1.27) 39(21.59,-1.27) 40(21.59,1.27) 41(24.13,-1.27) 42(24.13,1.27) 43(26.67,-1.27) 44(26.67,1.27)
  silkscreen extent -28.39,-2.96 28.39,2.96
TECO-120591-1-2_V [mm] "Lithium Battery Holder"
  round 1.52 hole 1.02: 1(-13.46,-1.27) 1(-13.46,1.27) 2(13.46,0)
  silkscreen extent -15.74,-9.53 13.65,9.53, body extent -13.65,-9.53 13.66,9.52, height 6.41

## Part data
BT1: library part CMP-0438-00001-2, "Lithium Battery Holder for CR2032 3V Cell", Manufacturer="TE Connectivity", AccessRights=2147483647, Body Shape="Horizontal Cylindrical", ComponentLink1Description="Manufacturer URL", ComponentLink1URL=http://www.te.com/, ComponentLink2Description=Datasheet, ComponentLink2URL=http://www.te.com/commerce/DocumentDelivery/DDEController?Action=showdoc&DocId=Customer+Drawing%7F120591%7FH%7Fpdf%7FEnglish%7FENG_CD_120591_H.pdf%7F120591-1, ContentType="Unified Component", ContentTypeGUID=CB3C11C4-E317-11DF-B822-12313F0024A2, DatasheetVersion="Rev. H, 01/2013", Folder="Unified Components\Components\TE Connectivity\Connectors & Connector Components\Power Products\Battery Interconnection Products\", FolderGUID=A6761B51-D489-48A3-9180-F4808F45AB79, ItemGUID=B2C50140-681E-4F62-8DBB-9728605318CE, ItemHRID=CMP-0438-00001, LifeCycle=Released, LifeCycleStateGUID=61E382EE-6656-4F12-9E24-BE9327104A25, Mounting Technology="Through Hole", PackageDescription="Lithium Battery Holder", PackageReference=120591-1, Packing Type=Tray, PartNumber=120591-1, ReleaseDate="20/08/2013 02:50:22 AM", RevisionId=1
C1 C3 C6 C7 C10 C11 C12 C13 C14 C21 C22: library part CMP-2007-01733-1, Manufacturer=Vitramon, Part Number=VJ0805Y104MXAAT
C2 C8: library part CMP-2007-03267-2, "CAP CER 2.2UF 16V X7R 0805", Capacitance=2.2uF, Case Code (Imperial)=0805, Case Code (Metric)=2012, Dielectric=X7R, Dielectric Material=Ceramic, Max Operating Temperature=125°C, Min Operating Temperature=-55°C, Package Quantity=1, Ratings=AEC-Q200, Tolerance=10%, Voltage Rating=16V, Case/Package=0805, Construction=Flat, Contact Plating=Tin, Depth=1.25mm, Height=1.25mm, Length=0.079inch, Mount="Surface Mount", Packaging="Cut Tape", Radiation Hardening=No, REACH SVHC="No SVHC", RoHS Compliant=Yes, Series=C, Thickness=0.055inch, Voltage Rating (DC)=16V, Width=0.049inch
C4 C5: library part CMP-03020-000773-1, "C0805 20 pF C0G 30ppm/°C 5.00% 50 V", Capacitance="20 pF", Manufacturer=KEMET, Package=C0805C-DN, Temperature="-55°C to +125°C", Temperature Characteristic=C0G, Temperature Coefficient=30ppm/°C, Temperature Range High=+125°C, Temperature Range Low=-55°C, Tolerance=0.05, Voltage Rating="50 V", Automotive=No, Category=Cap, ComponentLink2Description=Datasheet, ComponentLink2URL=https://content.kemet.com/datasheets/KEM_C1003_C0G_SMD.pdf, Device Class L1="Passive Components", Device Class L2=Capacitors, Device Class L3="Ceramic Capacitors", Height=0.88mm, Ipc Land Pattern Name=CAPC200125X78, Lead Free=Yes, Manufacturer Part Number=C0805C200J5GACAUTO, Material=Ceramic, Octopart=https://octopart.com/c0805c200j5gacauto-kemet-88373638, RoHS=TRUE
C9: library part CMP-2007-01044-1, Manufacturer=Kemet, Part Number=C0805C106K8RACTU
C15 C16 C19 C20: library part CMP-05427-000856-1, "Aluminum Electrolytic Capacitors (Radial Lead Type) 100uF ±20% 25V", Capacitance=100uF, Case/Package=Radial, ESR (Equivalent Series Resistance)=130mR, Max Operating Temperature=105°C, Min Operating Temperature=-40°C, Package Quantity=2000, Ripple Current=455mA, Tolerance=20%, Voltage Rating=25V, Diameter=6mm, Height - Seated (Max)=0.5inch, Impedance=130mR, Lead Diameter=0.5mm, Lead Pitch=5mm, Length=11mm, Life (Hours)=2000Hour, Mount="Through Hole", Packaging="Tape and Reel", Polarity=Polar, RoHS Compliant=Yes, Series=FM, Termination=Radial, Voltage Rating (DC)=25V
C17 C18: library part CMP-03020-011084-1, "C0805 12 pF C0G 30ppm/°C 5.00% 250 V", Capacitance="12 pF", Manufacturer=KEMET, Package=C0805C-DN, Temperature="-55°C to +125°C", Temperature Characteristic=C0G, Temperature Coefficient=30ppm/°C, Temperature Range High=+125°C, Temperature Range Low=-55°C, Tolerance=0.05, Voltage Rating="250 V", Automotive=No, Category=Cap, ComponentLink2Description=Datasheet, ComponentLink2URL=https://content.kemet.com/datasheets/KEM_C1003_C0G_SMD.pdf, Device Class L1="Passive Components", Device Class L2=Capacitors, Device Class L3="Ceramic Capacitors", Height=0.88mm, Ipc Land Pattern Name=CAPC200125X78, Lead Free=Yes, Manufacturer Part Number=C0805C120JAGACTU, Material=Ceramic, Octopart=https://octopart.com/c0805c120jagactu-kemet-88373179, RoHS=TRUE
D1: library part CMP-14398-000007-1, "DIODE ARRAY SCHOTTKY 30V SOT23", Ambient Temperature Range High=+150°C, Ambient Temperature Range Low=-55°C, Capacitance=10pF, Forward Current=200mA, Manufacturer=Nexperia, Max Surge Forward Current=600mA, Package=SOT23, Peak Reverse Current=2uA, Reverse Voltage=30V, Temperature="to +150°C", Automotive=Yes, Automotive Grade="Grade 0", Category=Diode, ComponentLink2Description=Datasheet, ComponentLink2URL=https://assets.nexperia.com/documents/data-sheet/BAT54_SER.pdf, Device Class L1="Discrete Semiconductors", Device Class L2=Diodes, Device Class L3="Schottky Diodes", Digikey Description="DIODE ARRAY SCHOTTKY 30V SOT23", Footprint Url=https://assets.nexperia.com/documents/outline-drawing/SOT23.pdf, Height=1.1mm, Ipc Land Pattern Name=SOT95P230X100-3, Lead Free=Yes, Manufacturer Part Number=BAT54C,215, Max Junction Temp=+150°C, Mouser Description="Schottky Diodes, Rectifiers - Arrays SOT-23 (TO-236AB) 30V 200mA (DC) Surface Mount", Octopart=https://octopart.com/bat54c%2C215-nexperia-78738945, RoHS=TRUE, Temperature Range High=+150°C
D2 D3: library part CMP-1055-00041-1, "Rectifier, 2-Pin Axial_Lead, Pb-Free, Bulk Bag", Manufacturer="On Semiconductor", ComponentLink1Description="Manufacturer URL", ComponentLink1URL=http://www.onsemi.com/, ComponentLink2Description=Datasheet, ComponentLink2URL=http://www.onsemi.cn/pub_link/Collateral/1N5817-D.PDF, ComponentLink3Description="Package Specification", ComponentLink3URL=http://www.onsemi.cn/pub_link/Collateral/59-10.PDF, Configuration=Single, DatasheetVersion="Rev. 10", IFSM Max (A)=25, Mounting Technology="Through Hole", PackageDescription="2-Pin, Axial Lead, Diameter 2.35 mm", PackageReference=AXIAL_LEAD-2-59-10, PackageVersion="Rev. U, 02/2005", Packing="Bulk Bag", PartNumber=1N5819G, RoHS=TRUE
FB1: library part CMP-2000-05194-2, "FERRITE BEAD 600 OHM 0805 1LN", Case Code (Imperial)=0805, Case Code (Metric)=2012, Current Rating=500mA, DC Resistance (DCR)=300mR, Frequency=100MHz, Max Operating Temperature=125°C, Min Operating Temperature=-40°C, Package Quantity=1, Case/Package=0805, Contact Plating=Tin, Core Material=Ferrite, Depth=1.45mm, Height=1.25mm, Impedance=600R, Lead Free="Lead Free", Length=2mm, Material=Ferrite, Max Current Rating=500mA, Max DC Current=500mA, Mount="Surface Mount", Number of Lines=1, Packaging="Tape and Reel", Termination=SMD/SMT, Test Frequency=100MHz, Weight=0.00392oz, Width=0.049inch
J1: library part CMP-17439-000304-1, "CONN HEADER VERT 5POS 2.5MM", Color=Green, Contact Resistance=20mR, Flammability Rating="UL94 V-0", Housing Color=White, Insulation Color=Natural, Max Current Rating=3A, Max Operating Temperature=85°C, Max Voltage Rating (AC)=250V, Min Operating Temperature=-25°C, Connector Type=Header, Contact Finish - Mating=TIN, Contact Material=Brass, Contact Plating=Copper, Contact Shape=Square, Contact Type="Male Pin", Depth=5.75mm, Fastening Type=Detent, Housing Material=Polyamide, Insulation Material=Nylon, Lead Free="Lead Free", Length=14.9mm, Mated Stacking Heights=9.8mm, Mount="Through Hole", Number of Positions=5, Number of Rows=1, Orientation=Straight, Packaging=Bulk, Pitch=2.5mm, Series=XH, Termination=Solder, Voltage Rating=250V
J1_LEFT J2_CENTRE J3_RIGHT: library part CMP-17439-000532-1, "CONN HEADER VERT 7POS 2.5MM", Color=Natural, Current Rating=3A, Flammability Rating="UL94 V-0", Housing Color=White, Voltage Rating=250V, Connector Type=Header, Contact Finish - Mating=TIN, Contact Material=Brass, Contact Mating Length=0.13inch, Contact Plating=Tin, Contact Shape=Square, Contact Type="Male Pin", Fastening Type=Friction, Gender=Male, Housing Material=Nylon, Insulation Color=Natural, Insulation Material=Nylon, Lead Free="Lead Free", Mated Stacking Heights=8.1mm, Mount="Through Hole", Number of Contacts=7, Number of Positions=7, Number of Rows=1, Orientation=Straight, Packaging=Bulk, Pitch=2.5mm, Series=EH, Termination=Solder
J2: library part CMP-17439-000649-1, "CONN HEADER VERT 3POS 2.5MM", Flammability Rating="UL94 V-0", Insulation Color=Natural, Max Operating Temperature=85°C, Min Operating Temperature=-25°C, Voltage Rating=250V, Connector Type=Header, Contact Finish - Mating=TIN, Contact Material=Brass, Contact Shape=Square, Contact Type="Male Pin", Fastening Type=Detent, Height=14.2mm, Insulation Material=Nylon, Lead Free="Lead Free", Length=9.9mm, Mated Stacking Heights=9.8mm, Mount="Through Hole", Number of Poles=3, Number of Positions=3, Number of Rows=1, Packaging=Bulk, Pitch=2.5mm, Series=XH, Termination=Press-Fit, Width=5.75mm
J3: "Micro USB, Input Output Connectors, B TYPE RECEPTACLE with flange", Package=None, Check_prices=https://www.snapeda.com/parts/10118194-0001LF/Amphenol+FCI/view-part/?ref=eda, MF="Amphenol ICC", MP=10118194-0001LF, SnapEDA_Link=https://www.snapeda.com/parts/10118194-0001LF/Amphenol+FCI/view-part/?ref=snap
J6 J7 J8 J9 J10 J11 J12: library part CMP-2000-05888-3, "CONN HEADER VERT 2POS 2.5MM", Color=Natural, Contact Resistance=20mR, Current Rating=3A, Housing Color=White, Insulation Resistance=1GR, Max Operating Temperature=85°C, Max Voltage Rating (AC)=250V, Min Operating Temperature=-25°C, Connector Type="Male Pin", Contact Material=Brass, Contact Plating=Tin, Contact Type="Male Pin", Depth=5.75mm, Fastening Type=Detent, Housing Material=Polyamide, Lead Free="Lead Free", Lead Pitch=2.5mm, Length=7.4mm, Max Current Rating=3A, Max Voltage Rating (DC)=250V, Mount="Through Hole", Number of Contacts=2, Number of Positions=2, Number of Rows=1, Orientation=Straight, Packaging=Bulk, Pitch=2.5mm, REACH SVHC="No SVHC", Series=XH, Termination=Solder, Voltage Rating=250V, Voltage Rating (AC)=250V, Wire/Cable Gauge=22AWG
P1 P2 P3 P4: library part CMP-2000-05904-1, "Male Header, Pitch 2.5 mm, 1 x 4 Position, Height 6 mm, Tail Length 3.2 mm, -25 to 85 degC, RoHS, Bulk", Manufacturer=JST, Package Description="Male Header, Pitch 2.5 mm, 1 x 4 Position, Height 6 mm, Tail Length 3.2 mm", Package Reference=B4B-EH-A, Datasheet URL=http://www.jst-mfg.com/product/pdf/eng/eEH.pdf, Datasheet Version=12/2012, Manufacturer URL=http://www.jst.com/home2.html, Mounting Technology=SurfaceMount, No of Positions=4, Pitch=2.5mm, Style/Orientation=StraightHeader/Plug, Termination=Crimp, Type=ShroudedHeader
Q1 Q2: library part CMP-32901-000488-1, "MOSFET N-CH 55V 47A TO220AB", Case/Package=TO-220, Continuous Drain Current (ID)=47A, Drain to Source Breakdown Voltage=55V, Drain to Source Resistance=35mR, Gate to Source Voltage (Vgs)=16V, Input Capacitance=1.7nF, Max Operating Temperature=175°C, Max Power Dissipation=110W, Min Operating Temperature=-55°C, Threshold Voltage=2V, Drain to Source Voltage (Vdss)=55V, Element Configuration=Single, Halogen Free="Halogen Free", Height=0.6inch, Lead Free="Lead Free", Length=0.414inch, Max Dual Supply Voltage=55V, Mount="Through Hole", Number of Pins=3, Packaging=Rail/Tube, Power Dissipation=110W, Rds On Max=22mR, REACH SVHC="No SVHC", RoHS Compliant=Yes, Turn-Off Delay Time=26ns, Turn-On Delay Time=11ns, Width=0.185inch
R1 R2 R5 R6 R7 R8 R9 R12 R13 R14 R15 R16 R17: library part CMP-03412-049031-1, "Thin Film Chip Resistors Automotive Grade 10kΩ 0.5% 50ppm/°C 0805", Case/Package=0805, Max Operating Temperature=155°C, Max Power Dissipation=125mW, Min Operating Temperature=-55°C, Ratings=AEC-Q200, Resistance=10kR, Resistor Type="Thin Film", Temperature Coefficient=50ppm/°C, Tolerance=0.5%, Features="Moisture Resistant", Height=0.024inch, Length=0.079inch, Number of Terminations=2, Packaging="Tape and Reel", RoHS Compliant=Yes, Series=AT, Width=0.049inch
R3 R4 R18 R19 R20: library part CMP-03412-047152-1, "Anti-Sulfurated Chip Resistor Automotive Grade 0Ω Jumper 0.125W 0805", Case Code (Imperial)=0805, Case Code (Metric)=2012, Max Operating Temperature=155°C, Max Power Dissipation=125mW, Min Operating Temperature=-55°C, Package Quantity=5000, Resistance=0R, Resistor Type="Thick Film", Case/Package=0805, Features="Moisture Resistant", Height=0.024inch, Length=0.079inch, Number of Terminations=2, Packaging="Tape and Reel", RoHS Compliant=Yes, Series=AF, Termination=SMD/SMT, Weight=0.000194oz, Width=1.25mm
R10 R11: library part CMP-26527-004085-1, "4.7kΩ ±5% 0.125W 0805 Thick Film Chip Resistor AEC-Q200 compliant", Case Code (Imperial)=0805, Case Code (Metric)=2012, Max Operating Temperature=155°C, Max Power Dissipation=125mW, Min Operating Temperature=-55°C, Package Quantity=10000, Resistance=4.7kR, Resistor Type="Thick Film", Temperature Coefficient=200ppm/°C, Tolerance=5%, Case/Package=0805, Contact Plating=Tin, Features="Automotive AEC-Q200", Height=0.026inch, Length=0.079inch, Mount="Surface Mount", Number of Terminations=2, Packaging="Tape and Reel", Radiation Hardening=No, RoHS Compliant=Yes, Series=RMCF, Width=0.049inch
R21 R22 R23 R24: library part CMP-26527-000104-1, "RES 0 OHM JUMPER 1/2W 0805", Case Code (Imperial)=0805, Case Code (Metric)=2012, Max Operating Temperature=155°C, Min Operating Temperature=-55°C, Package Quantity=1, Resistance=0mR, Case/Package=0805, Height=0.026inch, Lead Free="Lead Free", Length=0.079inch, Mount="Surface Mount", Number of Terminations=2, Packaging="Tape and Reel", Radiation Hardening=No, RoHS Compliant=Yes, Termination=Wraparound, Width=0.049inch
R25 R26 R29: library part CMP-250906-148809-1, "RES Thin Film,  1kΩ, 0.1%, 0.1W, 25ppm/°C, 0805"
R27 R28: library part CMP-2001-04488-2, "RES SMD 220 OHM 1% 1/8W 0805", Manufacturer=Yageo, Package=AC0805, Power Rating=1/8W, Resistance=220Ω, Temperature="-55°C to +155°C", Temperature Range High=+155°C, Temperature Range Low=-55°C, Tolerance=0.01, Voltage Rating=150V, Automotive=Yes, Automotive Grade="Grade 0", Category=Res, ComponentLink2Description=Datasheet, ComponentLink2URL=http://www.yageo.com/documents/recent/PYu-AC_51_RoHS_L_6.pdf, Composition="Thick Film", Device Class L1="Passive Components", Device Class L2=Resistors, Device Class L3="Chip SMD Resistors", Digikey Description="RES SMD 220 OHM 1% 1/8W 0805", Footprint Url=http://www.yageo.com/exep/pages/download/literatures/PYu-R_Mount_10.pdf, Height=0.6mm, Ipc Land Pattern Name=RESC200125X50, Lead Free=Yes, Manufacturer Part Number=AC0805FR-07220RL, Mouser Description="Thick Film Resistors - SMD 1/8W 220ohm 1% AEC-Q200", Octopart=https://octopart.com/ac0805fr-07220rl-yageo-26041145, RoHS=TRUE, Series=AC
S1 S2 S3 S4 S5 S6: "Dip Switch SPST 2 Position Through Hole Slide (Standard) Actuator 25mA 24VDC", Package=None, Check_prices=https://www.snapeda.com/parts/418117270902/W%25C3%25BCrth+Elektronik+Midcom/view-part/?ref=eda, MF="WÃ¼rth Elektronik", MP=418117270902, SnapEDA_Link=https://www.snapeda.com/parts/418117270902/W%25C3%25BCrth+Elektronik+Midcom/view-part/?ref=snap
S7 S8: "Dip Switch SPST 3 Position Through Hole Slide (Standard) Actuator 25mA 24VDC", Package=None, Check_prices=https://www.snapeda.com/parts/418117270903/W%25C3%25BCrth+Elektronik+Midcom/view-part/?ref=eda, MF="WÃ¼rth Elektronik", MP=418117270903, SnapEDA_Link=https://www.snapeda.com/parts/418117270903/W%25C3%25BCrth+Elektronik+Midcom/view-part/?ref=snap
SW1: library part CMP-2100-03586-2, "SWITCH TACTILE SPST-NO 0.05A 12V", Contact Current Rating=50mA, Contact Resistance=100mR, Insulation Resistance=100MR, Max Operating Temperature=70°C, Max Voltage Rating (DC)=12V, Min Operating Temperature=-25°C, Operating Force=1.5N, Package Quantity=1, Ratings="Dust Proof", Actuator Length=0.4mm, Actuator Type=Standard, Contact Material=Silver, Current Rating=50mA, Depth=2.5mm, Electrical Life=200000Cycles, Height=1.2mm, Illumination Type=Non-Illuminated, Lead Free="Lead Free", Length=4mm, Max Current Rating=50mA, Mechanical Life=200000Cycles, Mount="Surface Mount", Orientation=Straight, Packaging="Tape and Reel", Switch Function=Off-Mom, Switch Travel=0.15mm, Termination=SMD/SMT, Throw Configuration=SPST, Voltage Rating (DC)=12V, Weight=0.000776oz, Width=3mm
U1: library part CMP-78876-000009-2, "IC FLASH 16MBIT SPI/QUAD 8SOIC", Ambient Temperature Range High=85°C, Max Supply Voltage=3.6V, Min Operating Temperature=-40°C, Min Supply Voltage=2.7V, Access Time=5ms, Height=1.75mm, Interface=SPI, Max Operating Temperature=85°C, Memory Size=2MB, Memory Type=FLASH, NexarPartId=75645707, RoHS=Non-Compliant, Schedule B="8542320070, 8542320070"
U1_RIGHT U2_LEFT: "TMC2209 Motor Controller/Driver Power Management Evaluation Board", Package=None, Check_prices=https://www.snapeda.com/parts/TMC2209%20SILENTSTEPSTICK/Trinamic/view-part/?ref=eda, MF="Trinamic Motion Control GmbH", MP="TMC2209 SILENTSTEPSTICK", SnapEDA_Link=https://www.snapeda.com/parts/TMC2209%20SILENTSTEPSTICK/Trinamic/view-part/?ref=snap
U2 U4: "TB6612FNG Motor Controller/Driver Power Management Evaluation Board", Package=None, Availability="In Stock", Check_prices=https://www.snapeda.com/parts/ROB-14450/SparkFun%20Electronics/view-part/2656367/?ref=eda, MF="SparkFun Electronics", MP=ROB-14450, Price=None, SnapEDA_Link=https://www.snapeda.com/parts/ROB-14450/SparkFun%20Electronics/view-part/2656367/?ref=snap
U3: "ARMÂ® CortexÂ®-M4 STM32F4 Microcontroller IC 32-Bit Single-Core 168MHz 512KB (512K x 8) FLASH 100-LQFP (14x14)", Package="LQFP-100 STMicroelectronics", Availability="In Stock", Check_prices=https://www.snapeda.com/parts/STM32F407VET6/STMicroelectronics/view-part/?ref=eda, MF=STMicroelectronics, MP=STM32F407VET6, Price=None, Purchase-URL=https://pricing.snapeda.com/search/part/STM32F407VET6/?ref=eda, SnapEDA_Link=https://www.snapeda.com/parts/STM32F407VET6/STMicroelectronics/view-part/?ref=snap
U4_LEFT U5_RIGHT: "Stepper motor controler; IC: A4988; 1A; Uin mot: 8Ã·35V", Package=None, Availability=Unavailable, MP=A4988_STEPPER_MOTOR_DRIVER_CARRIER, Price=None
Y1: library part CMP-27762-009874-1, "CRYSTAL 8.0000MHZ 18PF SMD", Case/Package=SMD/SMT, ESR (Equivalent Series Resistance)=80R, Frequency=8MHz, Frequency Stability=50ppm, Frequency Tolerance=20ppm, Load Capacitance=18pF, Max Operating Temperature=70°C, Min Operating Temperature=-20°C, Operating Frequency="8 MHz", Package Quantity=1000, Accuracy=20ppm, Contact Plating=Tin, Depth=4.7mm, Height=0.165inch, Lead Free="Lead Free", Length=11.4mm, Mount="Surface Mount", Number of Pins=2, Packaging="Tape and Reel", Radiation Hardening=No, REACH SVHC="No SVHC", Series=ABLS, Series Resistance=80R, Termination=SMD/SMT, Tolerance=20ppm, Width=4.7mm
Y2: library part CMP-200220-000019-1, "CRYSTAL 32.7680KHZ 12.5PF SMD", Case/Package=SMD/SMT, ESR (Equivalent Series Resistance)=80kR, Frequency=32.768kHz, Frequency Tolerance=20ppm, Load Capacitance=12.5pF, Max Operating Temperature=85°C, Min Operating Temperature=-40°C, Height=0.024inch, Length=0.081inch, Mount="Surface Mount", Packaging="Cut Tape", RoHS Compliant=Yes, Series=NX2012SA, Width=0.047inch

## Via types
v1: diameter 0.5, hole 0.3, Top Layer 1 to Bottom Layer 1, 159 vias
v2: diameter 0.5, hole 0.4, Top Layer 1 to Bottom Layer 1, 2 vias

## Nets (pads, with @x,y where several pads share a name; then routed paths per layer and width w, separated by ;. In a path a pad name is that pad's centre, name@x,y a point inside that pad or via, vN(x,y) a via of type N, cw(c..) or ccw(c..) an arc to the next point about the centre after c; other vN are vias at no path point)
3V3: C1.2 C6.2 C9.2 C10.2 C11.2 C12.2 C13.2 C14.2 C22.1 D1.1 J1.2 J2.1 J4.3 J4.4 J5.1 J5.2 R1.1 R10.1 R11.1 R29.1 S1.A1 S1.A2 S2.A1 S2.A2 S3.A1 S4.A1 S5.A1 S6.A1 S7.A1 S7.A2 S7.A3 S8.A1 S8.A2 S8.A3 U1.3 U1.7 U1.8 U1_RIGHT.2 U2.2 U2.11 U2.13 U2.14 U2_LEFT.2 U3.11 U3.19 U3.28 U3.50 U3.75 U3.100 U4.2 U4.11 U4.13 U4.14 | length 675.6
  Top Layer 1 w0.3: v1(121.539,48.26) 123.221,49.942 123.221,50.265 123.817,50.861 123.817,51.388 123.247,51.958 123.247,60.571 123.221,60.597 U3.50@123.221,68.831
  Top Layer 1 w0.33: v1(101.693,79.917) 102.489,79.121 R1.1@102.489,78.266 ; C10.2@107.442,74.358 107.927,73.873 108.544,73.873 108.831,73.586 109.466,73.586 U3.19@109.471,73.581 109.476,73.576 110.401,73.576 110.825,73.152 v1(110.871,73.152) 110.886,73.137 111.616,73.137 112.983,71.77 113.713,71.77 v1(113.728,71.755) 113.695,71.722 113.695,71.382 112.221,69.907 U3.28@112.221,68.831 112.221,67.517 v1(110.998,66.294) ; U3.11@109.471,77.581 111.649,77.581 v1(111.887,77.343) ; U3.100@111.221,84.331 111.221,82.772 v1(112.078,81.915) ; U1.8@116.459,96.266 U1.7@116.459,97.536 118.318,97.536 118.699,97.917 v1(118.745,97.917) 118.758,97.93 119.49,97.93 120.366,98.806 U1.3@121.291,98.806 ; v1(122.682,81.914) 123.349,82.581 U3.75@124.971,82.581 ; v1(123.698,39.751) 123.841,39.894 D1.1@125.923,39.894 ; C1.2@133.477,89.345 133.795,89.027 J1.2@137.922,89.027
  Top Layer w0.33: v1(110.871,73.152) 111.887,74.168 v1(111.887,77.343)
  Bottom Layer w0.33: v1(101.693,79.917) 101.693,80.518 ; v1(118.745,97.917) 114.815,93.987 104.308,93.987 99.307,88.986 99.307,85.668 101.092,83.883 101.092,80.518 101.693,80.518 ; v1(122.682,81.914) 122.649,81.881 122.649,81.374 v1(119.507,78.232) 119.461,78.232 119.334,78.359 v1(117.983,78.359) 116.967,77.343 v1(111.887,77.343) 108.712,80.518 101.693,80.518
  Bottom Layer w1: U4.11@31.115,29.337 37.212,35.434 41.275,35.434 ; 32.97,30.927 34.34,30.927 35.93,29.337 U4.13@36.195,29.337 U4.14@38.735,29.337 ; U2.14@38.608,89.916 U2.13@36.068,89.916 35.803,89.916 34.213,91.506 32.843,91.506 31.253,89.916 U2.11@30.988,89.916 ; U1_RIGHT.2@66.548,96.393 70.442,92.499 70.442,83.132 68.529,81.22 62.805,81.22 S1.A1@60.833,79.248 S1.A2@60.833,76.708 60.892,76.649 62.289,76.649 S5.A1@68.58,70.358 68.58,70.275 68.784,70.071 68.784,61.291 U2_LEFT.2@66.421,58.928 70.315,55.034 70.315,45.667 68.212,43.564 62.36,43.564 S2.A1@60.198,41.402 ; S4.A1@80.391,63.881 82.638,66.128 83.908,66.128 S8.A3@85.471,67.691 S8.A2@85.471,65.151 S8.A1@85.471,62.611 88.551,59.531 96.899,59.531 116.679,39.751 v1(123.698,39.751) 126.365,37.084 126.365,36.449 ; v1(118.745,97.917) 119.248,98.42 127.2,98.42 127.283,98.337 127.987,98.337 128.07,98.42 128.529,98.42 J1.2@137.922,89.027 141.478,92.583 J4.4@141.478,114.173 J4.3@141.478,116.713 ; J5.2@134.747,25.527 J5.1@134.747,28.067 126.365,36.449 ; J4.4@141.359,114.6 137.884,111.125 97.409,111.125 S7.A1@87.757,101.473 S7.A2@87.757,104.013 S7.A3@87.757,106.553 82.042,112.268 68.239,112.268 66.229,114.278 65.089,114.278 63.079,112.268 57.618,112.268 J2.1@55.372,114.514 50.506,114.514 U2.2@41.148,105.156 30.988,94.996 U2.11@30.988,89.916 ; U2.11@30.988,89.916 30.988,54.864 U4.2@41.275,44.577 41.275,35.434 ; 41.275,35.434 54.23,35.434 S2.A1@60.198,41.402 ; S2.A1@60.198,41.402 S2.A2@60.198,38.862 63.817,35.242 64.706,35.242 S6.A1@68.326,31.623 83.185,31.623 S3.A1@88.011,36.449 126.365,36.449
  Bottom Layer 1 w0.3: v1(121.539,48.26) 121.539,41.91 v1(123.698,39.751)
  Bottom Layer 1 w0.33: R29.1@109.028,65.659 110.363,65.659 v1(110.998,66.294) ; v1(111.887,77.343) 111.92,77.376 112.013,77.376 112.529,77.892 112.529,78.318 112.078,78.769 C11.2@112.078,79.883 v1(112.078,81.915) ; v1(113.728,71.755) v1(113.728,73.406) C14.2@113.855,73.533 ; R10.1@117.475,79.849 117.475,78.679 117.668,78.486 117.81,78.486 117.937,78.359 v1(117.983,78.359) ; R11.1@119.253,79.815 119.253,78.532 119.507,78.278 v1(119.507,78.232) ; C9.2@120.904,81.791 121.027,81.914 v1(122.682,81.914)
+5: FB1.1 J2.3 J4.1 J4.2 | length 103.3
  Top Layer 1 w0.4: v1(139.319,107.95) 139.319,105.716 140.803,104.232 FB1.1@140.803,104.14
  Top Layer 1 w1: J2.3@55.372,109.514 64.149,109.514 65.856,107.807 92.35,107.807 94.858,105.299 98.282,105.299 v1(99.949,103.632)
  Top Layer w1: v1(99.949,103.632) 135.001,103.632 v1(139.319,107.95)
  Bottom Layer 1 w0.4: v1(139.319,107.95) 144.018,112.649 J4.2@144.018,114.173 J4.1@144.018,116.713
+12: C15.2 C16.2 C19.2 C20.2 D2.1 D3.1 J6.1 J10.1 J12.1 U1_RIGHT.8 U2.1 U2_LEFT.8 U4.1 U4_LEFT.16 U5_RIGHT.16 | length 251.2
  Bottom Layer w1: J12.1@38.842,61.07 40.984,58.928 ; U2.1@43.688,105.156 49.042,105.156 ; U4.1@43.815,44.577 43.815,56.097 40.984,58.928 ; 79.805,77.158 79.453,76.806 76.597,73.95 76.597,44.043 81.454,39.186 96.79,39.186 97.99,40.386 C20.2@98.044,40.386 98.044,43.307 U4_LEFT.16@95.885,45.466 ; U5_RIGHT.16@96.139,83.947 96.139,79.423 95.553,78.837 91.029,78.837 88.9,76.708 82.403,76.708 C19.2@80.879,78.232 80.825,78.232 79.976,77.383 79.579,77.383 79.228,77.032 77.53,77.032 77.179,77.383 77.179,81.932 73.387,85.724 73.387,102.675 J6.1@65.659,110.403 60.412,105.156 49.042,105.156 ; 40.984,58.928 U2_LEFT.8@51.181,58.928 51.181,59.065 52.217,60.101 C16.2@52.217,64.008 47.391,68.834 D3.1@42.997,68.834 32.568,79.263 D2.1@32.568,82.423 38.444,82.423 45.278,89.257 45.278,90.363 U1_RIGHT.8@51.308,96.393 51.308,96.53 52.217,97.439 C15.2@52.217,101.981 49.042,105.156
BOOT0: J1.1 R2.2 U3.94 | length 68
  Top Layer 1 w0.4: U3.94@114.221,84.331 114.221,85.916 114.331,86.026 114.331,86.062 115.93,87.661 116.089,87.661 125.955,97.527 128.699,97.527 128.851,97.375 129.721,97.375 129.873,97.527 138.336,97.527 139.422,96.441 139.422,89.113 138.336,88.027 138.156,88.027 137.922,87.793 J1.1@137.922,86.527
  Bottom Layer 1 w0.3: R2.2@115.697,82.042 115.415,82.324 115.415,83.174 115.708,83.467 117.122,83.467 117.698,84.043 135.438,84.043 J1.1@137.922,86.527
GND: BT1.2 C1.1 C2.1 C3.1 C4.1 C5.1 C6.1 C7.1 C8.1 C9.1 C10.1 C11.1 C12.1 C13.1 C14.1 C17.1 C18.2 C21.1 C22.2 J1.3 J2.2 J3.5 J4.5 J4.6 J5.3 J5.4 J5.5 J5.6 J6.2 Q1.3 Q2.3 R2.1 R5.1 R6.1 R7.1 R8.1 R9.1 R12.1 R13.1 R14.1 R15.1 R16.1 R17.1 R18.2 SW1.2 U1.4 U1_RIGHT.1 U2.3 U2.8 U2.9 U2.12 U2.15 U2_LEFT.1 U3.10 U3.20 U3.27 U3.74 U3.99 U4.3 U4.8 U4.9 U4.12 U4.15 U4_LEFT.15 U5_RIGHT.15 | length 637.8
  Top Layer 1 w0.3: SW1.2@99.822,77.519 99.822,79.248 v1(100.076,79.502) ; C7.1@102.235,71.246 102.362,71.373 C3.1@102.362,72.962 102.862,73.462 102.992,73.462 104.829,75.299 C4.1@105.029,75.299 C18.2@105.029,76.708 ; v1(102.489,84.201) 103.516,83.174 ; C5.1@104.787,82.931 103.759,82.931 103.516,83.174 ; C17.1@105.029,81.268 104.829,81.268 103.516,82.581 103.516,83.174
  Top Layer 1 w0.4: v1(99.695,69.977) 99.711,69.977 100.98,71.246 C7.1@102.235,71.246 ; C10.1@107.442,72.708 107.863,73.129 108.745,73.129 108.753,73.121 109.071,73.121 109.101,73.091 109.668,73.091 109.718,73.041 110.195,73.041 110.979,72.257 110.979,72.028 v1(110.998,72.009) ; U3.10@109.471,78.081 109.483,78.093 112.002,78.093 v1(112.014,78.105) ; U3.27@111.721,68.831 111.721,70.065 112.078,70.422 v1(112.078,71.755) ; U3.99@111.721,84.331 111.721,84.124 111.761,84.084 111.761,83.607 111.937,83.431 113.138,83.431 113.638,82.931 v1(113.665,82.931) ; v1(118.745,99.631) 118.772,99.631 119.217,100.076 U1.4@121.291,100.076 ; v1(122.682,80.264) 123.63,81.212 123.63,81.49 124.181,82.041 124.931,82.041 U3.74@124.971,82.081 ; C1.1@133.477,90.995 133.927,91.445 135.69,91.445 135.772,91.527 J1.3@137.922,91.527 ; v1(144.272,106.426) 144.556,106.71 145.109,106.71 145.266,106.867 J3.5@146.685,106.867
  Top Layer 1 w1: v1(120.142,43.307) 120.662,43.307 121.857,42.112 C21.1@121.857,42.037
  Top Layer w0.4: v1(110.998,72.009) 110.321,72.686 110.321,76.555 111.659,77.893 111.775,77.893 111.987,78.105 v1(112.014,78.105) ; v1(115.062,78.232) 115.035,78.232 114.908,78.105 v1(113.665,78.105) v1(112.014,78.105) ; J4.6@138.938,114.173 138.938,111.76 v1(144.272,106.426) 141.183,103.337 141.183,95.874 138.113,92.804 138.113,91.718 J1.3@137.922,91.527 129.818,99.631 127.969,99.631 127.863,99.737 127.407,99.737 127.301,99.631 v1(118.745,99.631) 118.745,98.695 116.195,96.145 116.195,85.207 112.014,81.026 v1(112.014,78.105)
  Top Layer w1: U2.9@25.908,89.916 U2.8@25.908,105.156 26.173,105.156 27.763,106.746 36.753,106.746 38.343,105.156 U2.3@38.608,105.156 ; U4.9@26.035,29.337 26.3,29.337 27.89,30.927 31.8,30.927 33.39,29.337 U4.12@33.655,29.337 33.92,29.337 35.51,30.927 39.42,30.927 41.01,29.337 U4.15@41.275,29.337 ; 39.425,91.639 38.608,92.456 U2.3@38.608,105.156 ; 39.552,31.06 38.735,31.877 U4.3@38.735,44.577 38.47,44.577 36.88,42.987 27.89,42.987 26.3,44.577 U4.8@26.035,44.577 25.95,44.662 25.95,64.05 Q2.3@27.94,66.04 27.94,66.27 26.415,67.795 26.415,78.763 27.94,80.288 Q1.3@27.94,80.518 33.528,86.106 U2.12@33.528,89.916 33.793,89.916 35.383,91.506 39.293,91.506 40.883,89.916 U2.15@41.148,89.916 ; v1(58.183,53.103) 59.436,54.356 v1(63.246,54.356) 64.389,54.356 U2_LEFT.1@68.961,58.928 ; v1(58.547,90.424) 58.674,90.551 v1(58.674,91.313) 64.008,91.313 U1_RIGHT.1@69.088,96.393 ; v1(92.837,91.694) 93.726,90.805 v1(95.758,90.805) 95.758,90.678 v1(94.488,89.408) 93.599,88.519 U5_RIGHT.15@93.599,83.947 ; v1(95.631,53.34) 94.996,52.705 v1(92.837,52.705) 92.583,52.451 v1(92.583,49.911) 93.345,49.149 U4_LEFT.15@93.345,45.466 ; v1(99.695,69.977) 99.695,79.121 v1(100.076,79.502) ; v1(102.489,84.201) 102.489,84.006 101.766,83.283 101.766,81.192 v1(100.076,79.502) ; 116.713,41.021 J5.5@129.667,28.067 J5.3@132.207,28.067 J5.4@132.207,25.527 J5.6@129.667,25.527 ; v1(120.142,43.307) 119.253,42.418 117.856,42.418 116.459,41.021 BT1.2@107.19,41.021 104.968,43.243 95.568,43.243 U4_LEFT.15@93.345,45.466 ; v1(122.682,80.264) 122.682,79.617 119.38,76.315 v1(119.38,73.025) v1(118.364,73.025) 117.534,73.025 112.366,78.193 102.215,78.193 100.906,79.502 v1(100.076,79.502) ; J4.6@138.938,114.173 J4.5@138.938,116.713 ; U2.3@38.608,105.156 38.608,111.89 39.709,112.991 46.998,112.991 47.975,112.014 J2.2@55.372,112.014 55.48,112.014 56.369,112.903 J6.2@65.659,112.903 70.435,108.127 70.435,97.877 69.088,96.53 U1_RIGHT.1@69.088,96.393 ; U2_LEFT.1@68.961,58.928 69.058,59.025 69.689,59.025 81.645,70.982 81.645,71.231 89.251,78.837 94.331,78.837 95.093,79.599 95.093,80.675 93.393,82.375 93.393,82.682 93.498,82.786 93.498,83.846 U5_RIGHT.15@93.599,83.947 ; U2_LEFT.1@68.961,58.928 75.69,52.199 86.612,52.199 U4_LEFT.15@93.345,45.466 ; U1_RIGHT.1@69.088,96.393 75.309,90.172 87.374,90.172 U5_RIGHT.15@93.599,83.947 ; U5_RIGHT.15@93.599,83.947 98.044,79.502 v1(100.076,79.502)